# EAGLE board aleph-primary130828 (EAGLE 6.4), part 1 of 3
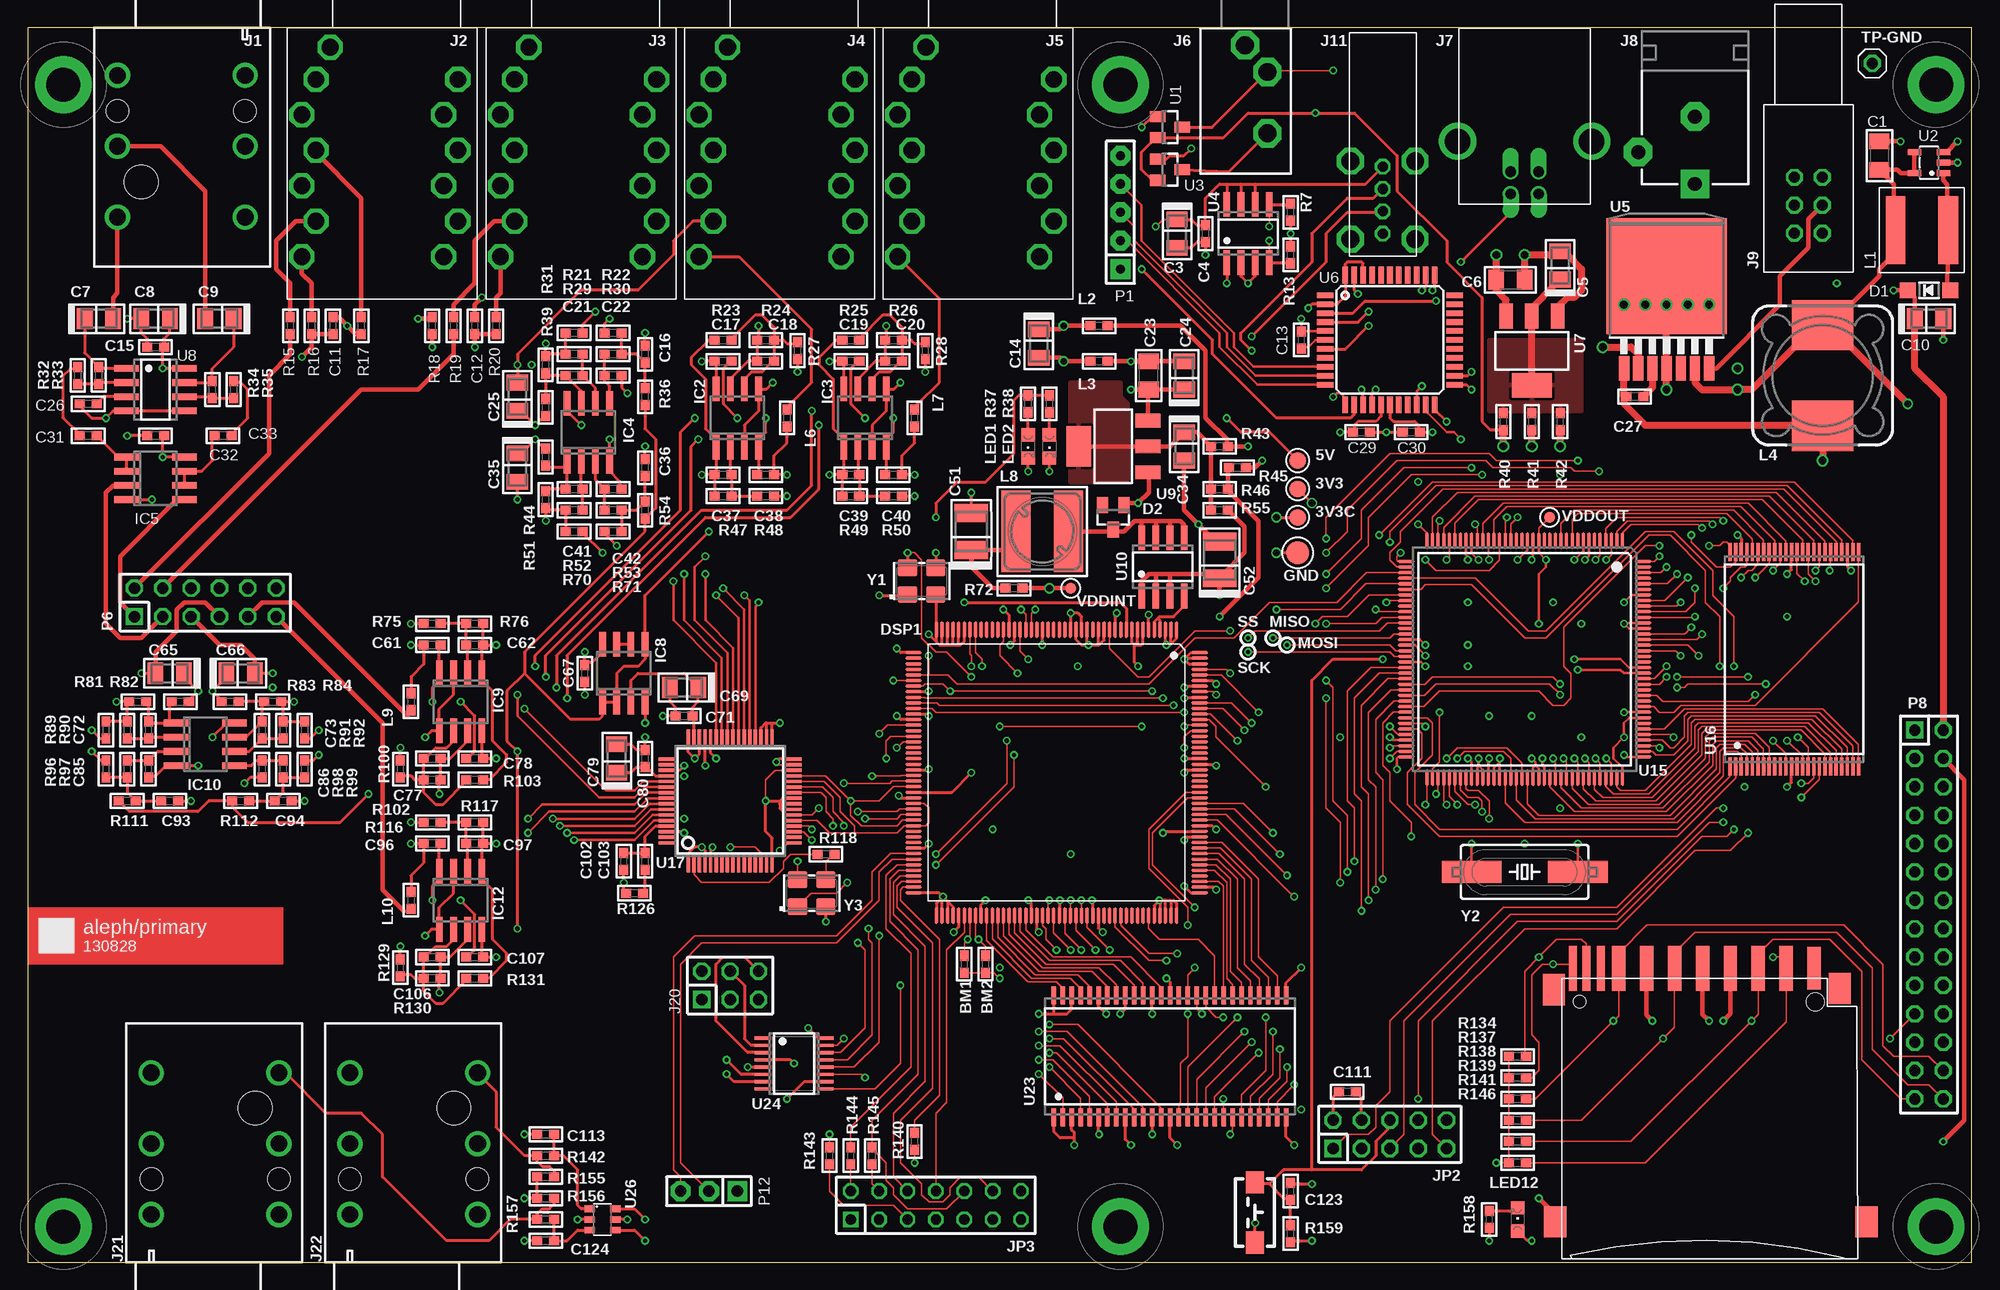
[diagram p0: board, top side]
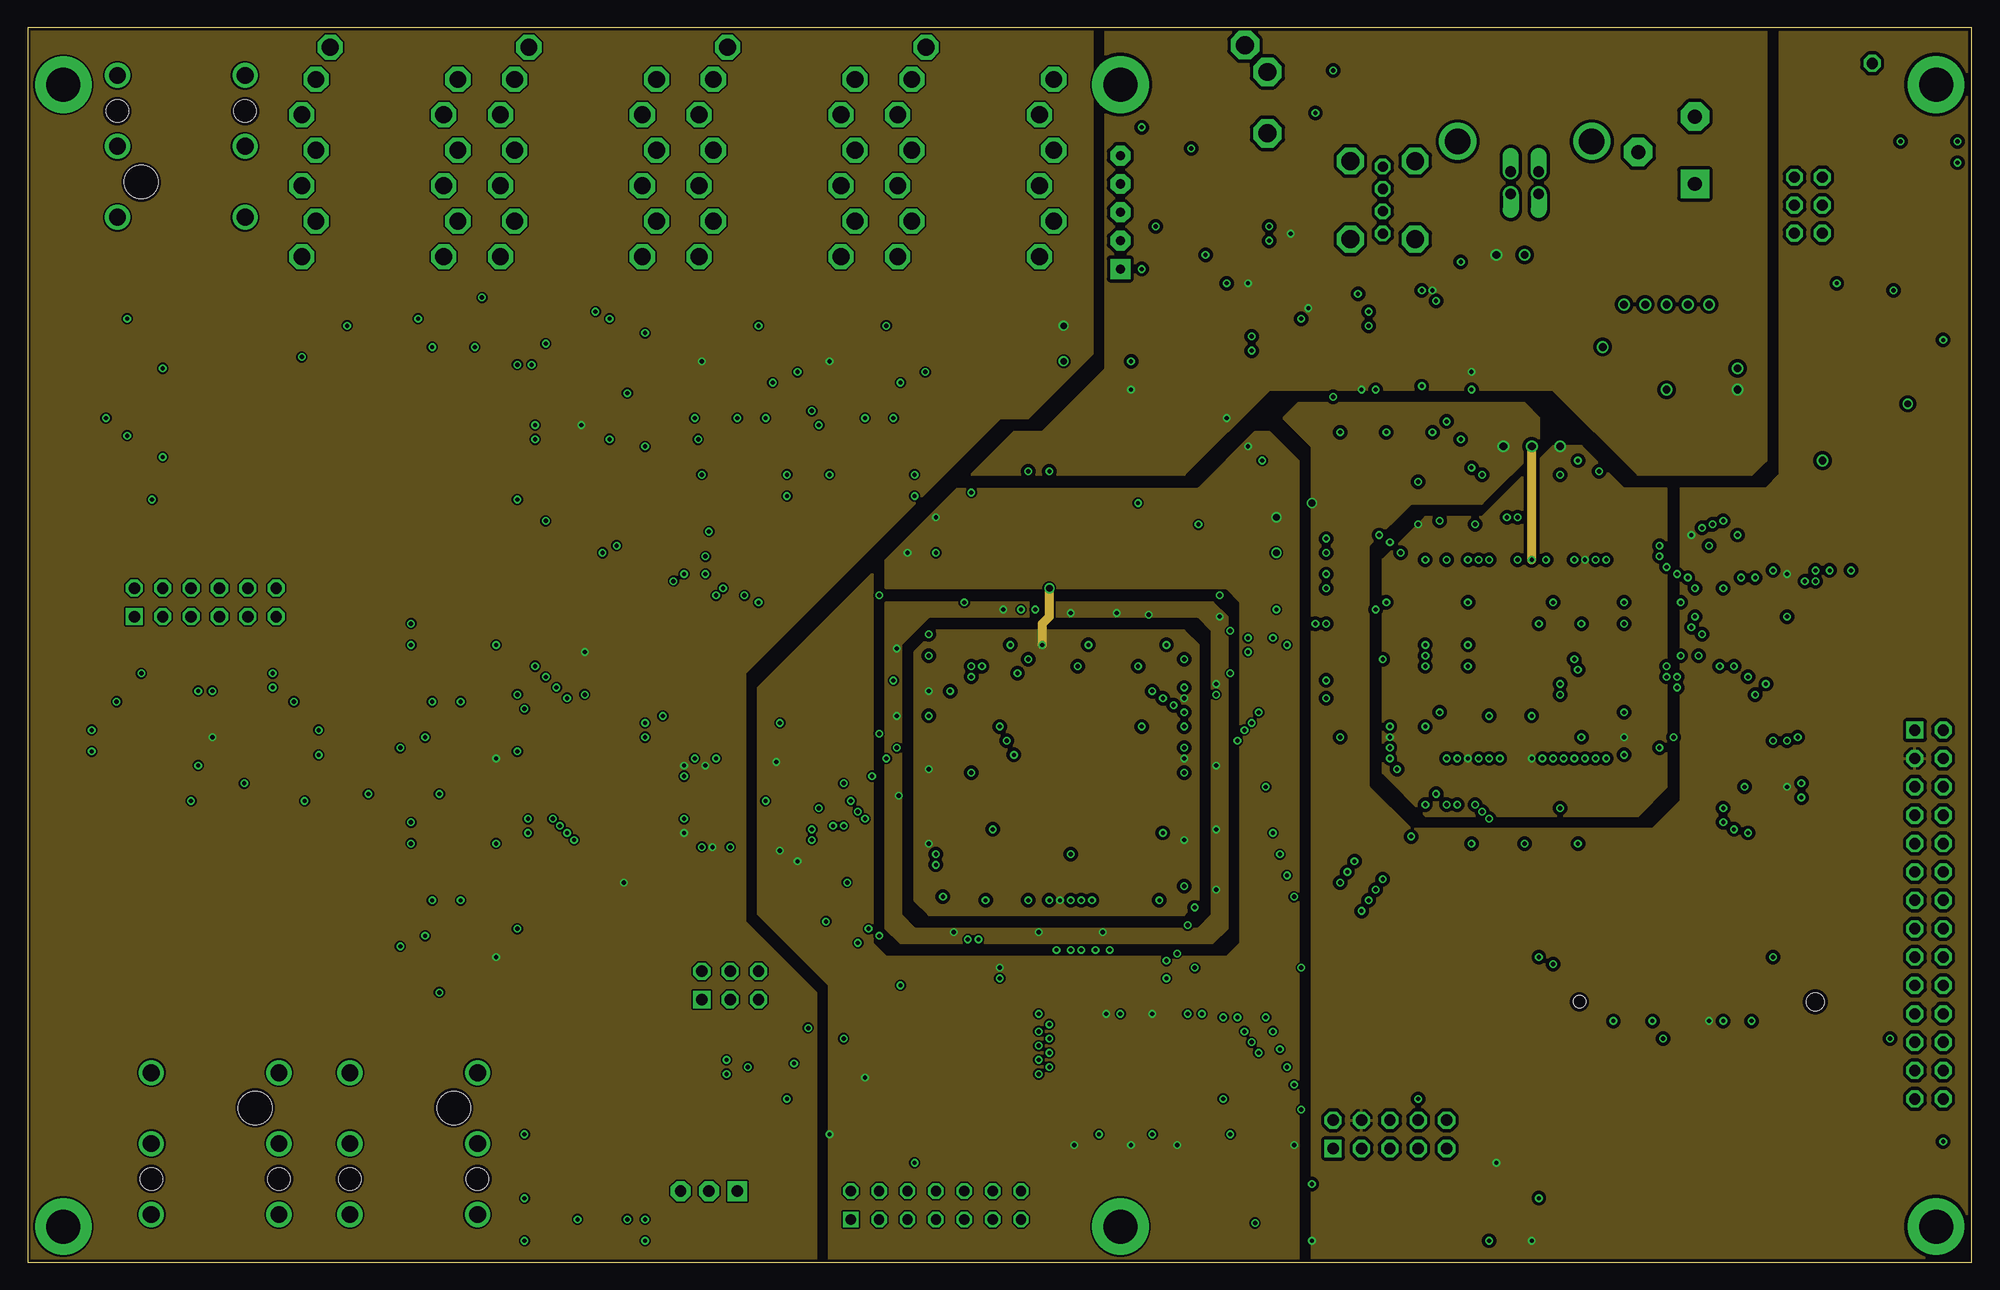
[diagram p1: board, inner layer power]
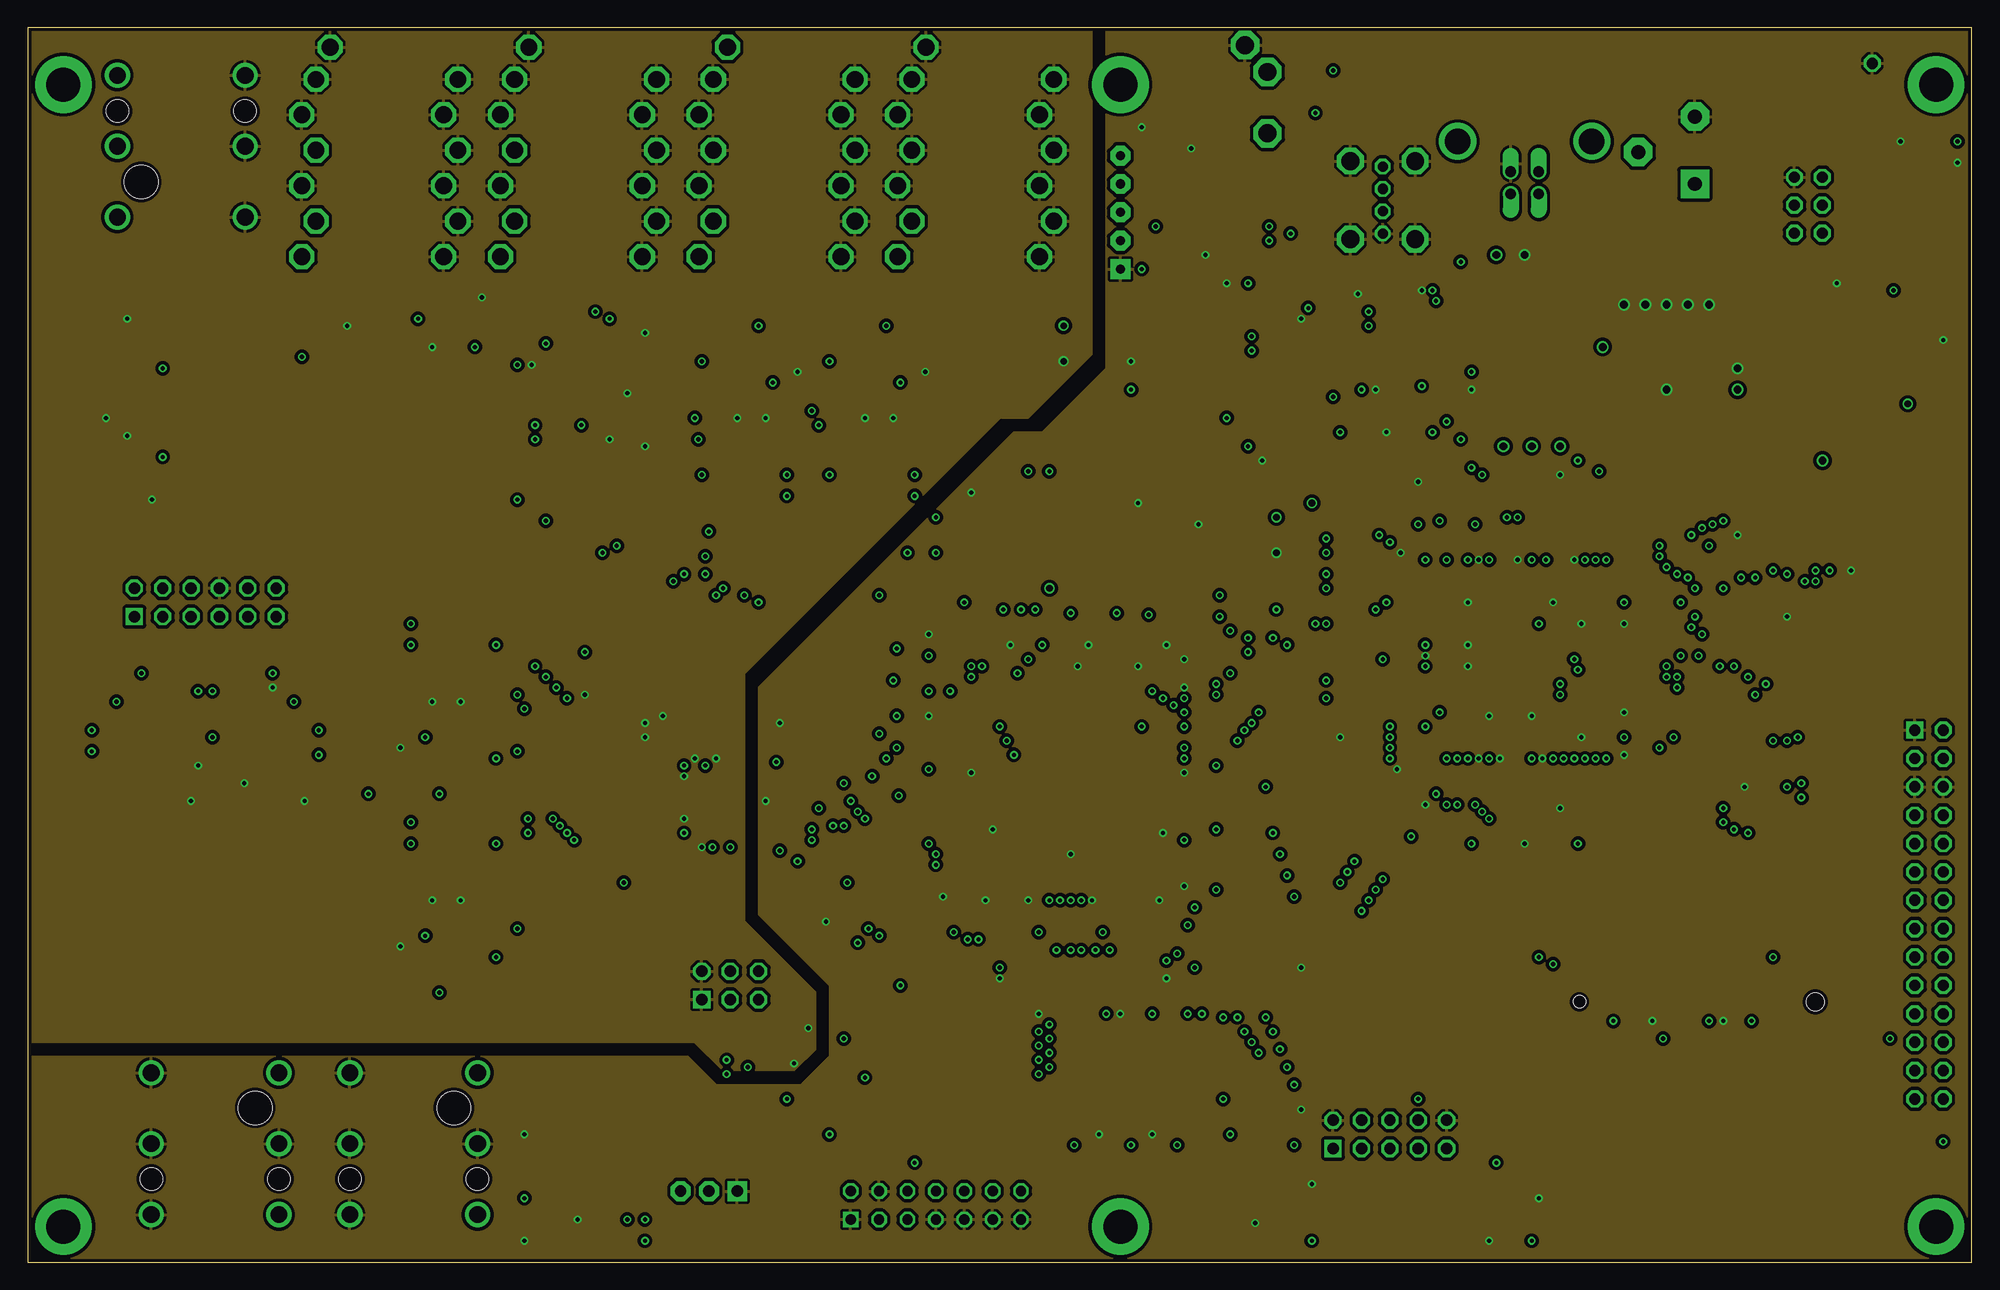
[diagram p2: board, inner layer gnd]
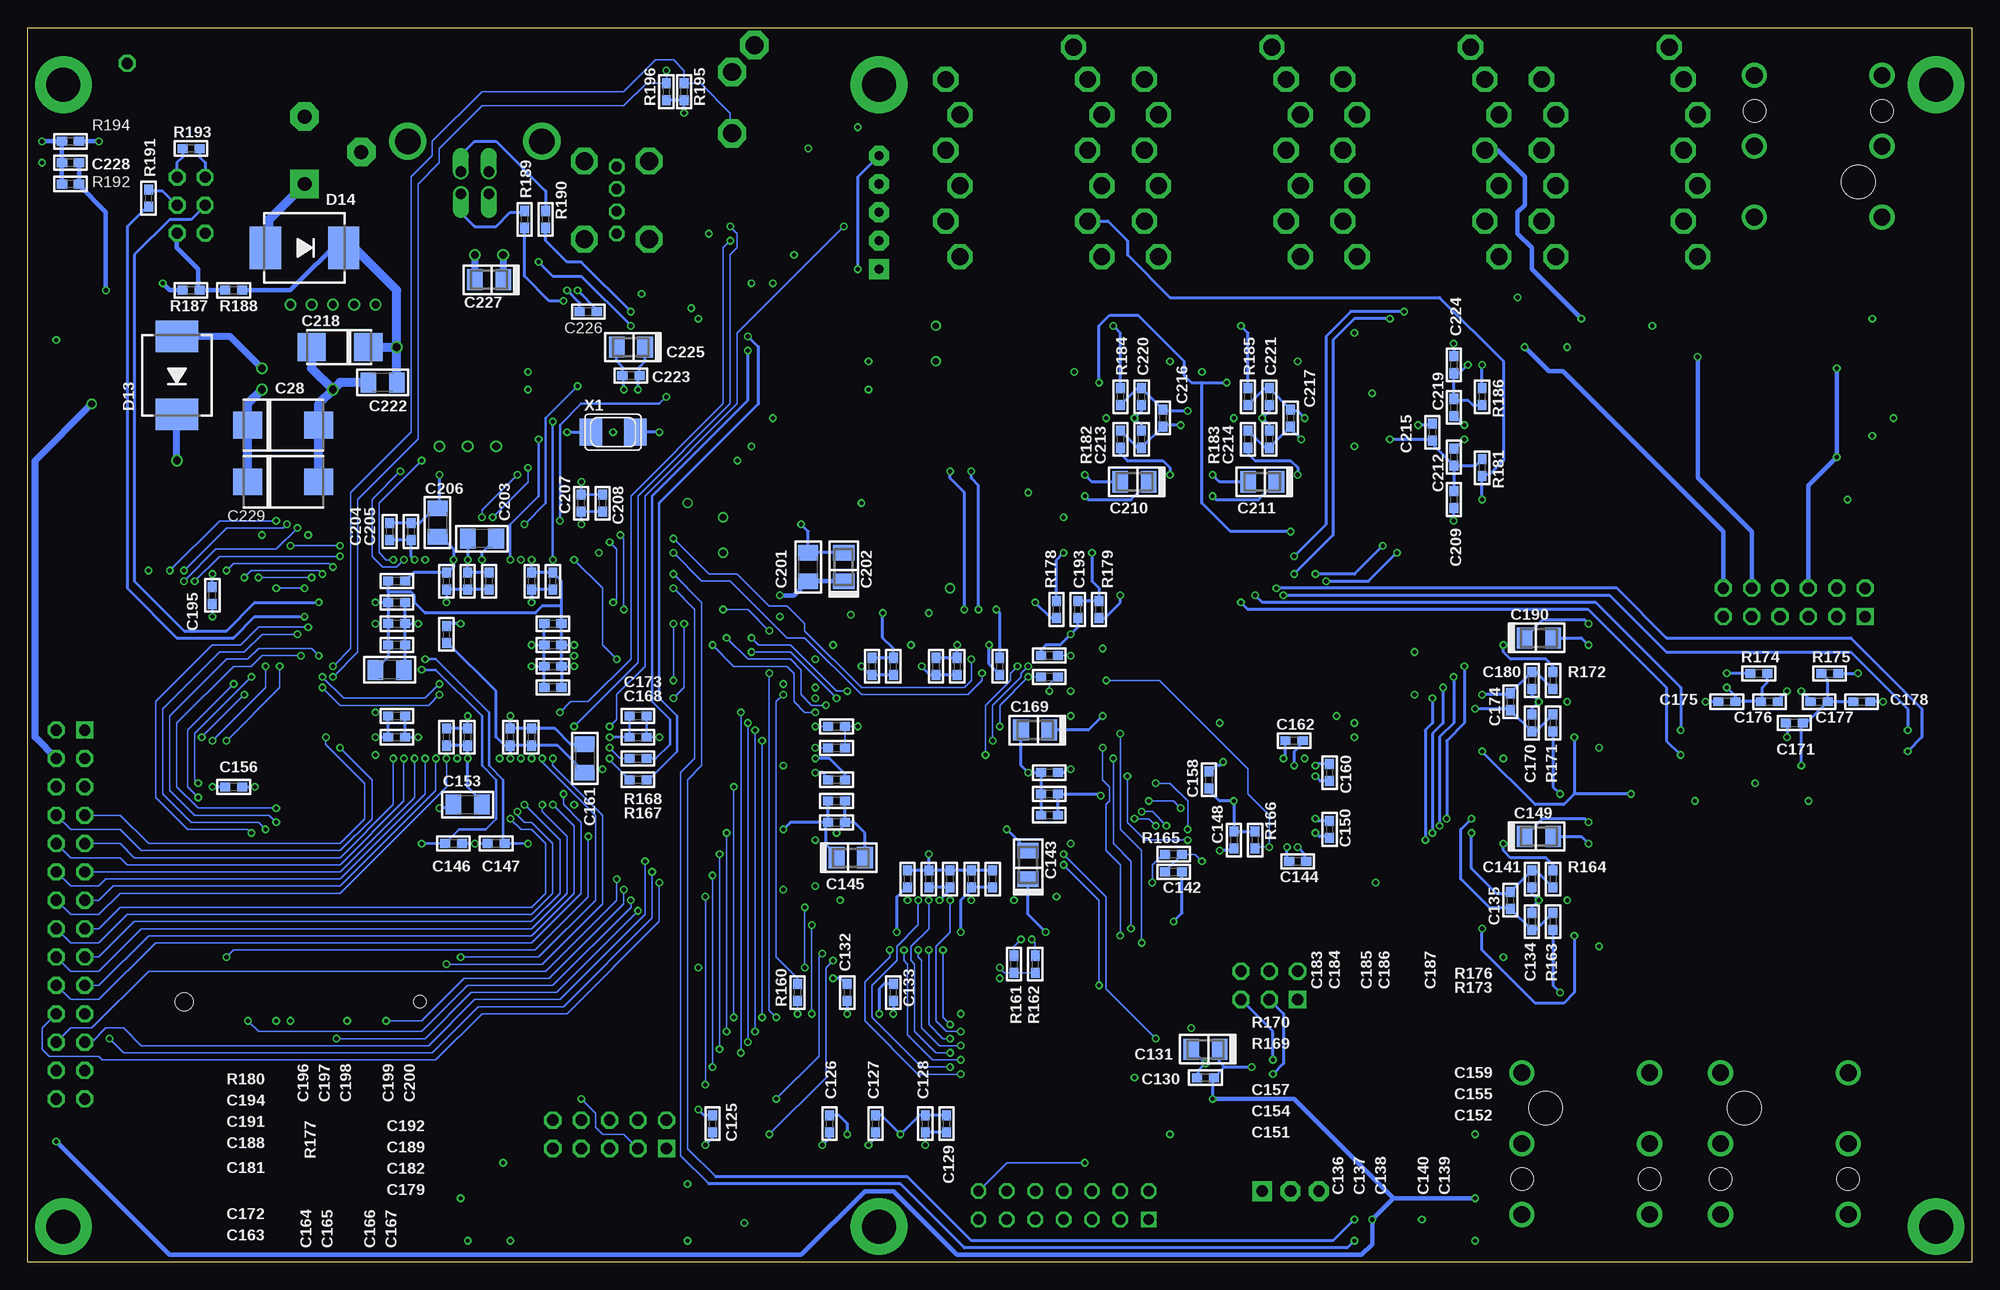
[diagram p3: board, bottom side, seen from below]

Size 173.99 x 110.49 mm. Coordinates in mm from the lower left corner, seen from the top.
Outline: 0,0 173.99,0 173.99,110.49 0,110.49 0,0
Copper layers (1*2+3*16): Top 0.035mm / dielectric 1.5mm / power 0.035mm / dielectric 0.15mm / gnd 0.035mm / dielectric 0.2mm / Bottom 0.035mm
Design rules "default *": minimum track width 6mil, minimum drill 15mil, track to track 6mil, track to pad 6mil, pad to pad 6mil, via to via 6mil, smd to smd 6mil, copper to edge 10mil, drill to drill 8mil, minimum pad ring 6mil, minimum via ring 6mil, stop-mask expansion 4mil, vias tented up to drill 0mil, thermal gap 10mil

## Footprints (pad centres in the part's own frame; a part is rotated, then mirrored left to right if it is on the bottom)
SMD-15R = smd 1.5 x 1.5: TP 0,0
R0603 = smd 0.9 x 0.8: 1 -0.762,0; 2 0.762,0
C1206 = smd 1.4 x 1.8: 1 -1.27,0; 2 1.27,0
C1206/T = smd 1.4 x 1.9: + 1.27,0; - -1.27,0
C0603 = smd 0.9 x 0.8: 1 -0.762,0; 2 0.762,0
C7343-43 = smd 2.6 x 2.4: + 3.175,0; - -3.175,0
C1210/T = smd 1.6 x 3: + 1.651,0; - -1.651,0
C6032-28/T = smd 2.55 x 2.5: + 2.54,0; - -2.54,0
SOD123 = smd 1.4 x 1.4: A 1.905,0; C -1.905,0
SOT23 = smd 1 x 1.4: 1 -0.95,-1.1; 2 0.95,-1.1; 3 0,1.1
SMC = smd 2.8 x 3.8: A 3.493,0; C -3.493,0
LQFP176 = smd 1.5 x 0.25: P$1 -12.8,10.75; P$2 -12.8,10.25; P$3 -12.8,9.75; P$4 -12.8,9.25; P$5 -12.8,8.75; P$6 -12.8,8.25; P$7 -12.8,7.75; P$8 -12.8,7.25; P$9 -12.8,6.75; P$10 -12.8,6.25; P$11 -12.8,5.75; P$12 -12.8,5.25; P$13 -12.8,4.75; P$14 -12.8,4.25; P$15 -12.8,3.75; P$16 -12.8,3.25; P$17 -12.8,2.75; P$18 -12.8,2.25; P$19 -12.8,1.75; P$20 -12.8,1.25; P$21 -12.8,0.75; P$22 -12.8,0.25; P$23 -12.8,-0.25; P$24 -12.8,-0.75; P$25 -12.8,-1.25; P$26 -12.8,-1.75; P$27 -12.8,-2.25; P$28 -12.8,-2.75; P$29 -12.8,-3.25; P$30 -12.8,-3.75; P$31 -12.8,-4.25; P$32 -12.8,-4.75; P$33 -12.8,-5.25; P$34 -12.8,-5.75; P$35 -12.8,-6.25; P$36 -12.8,-6.75; P$37 -12.8,-7.25; P$38 -12.8,-7.75; P$39 -12.8,-8.25; P$40 -12.8,-8.75; P$41 -12.8,-9.25; P$42 -12.8,-9.75; P$43 -12.8,-10.25; P$44 -12.8,-10.75; P$89 12.8,-10.75; P$90 12.8,-10.25; P$91 12.8,-9.75; P$92 12.8,-9.25; P$93 12.8,-8.75; P$94 12.8,-8.25; P$95 12.8,-7.75; P$96 12.8,-7.25; P$97 12.8,-6.75; P$98 12.8,-6.25; P$99 12.8,-5.75; P$100 12.8,-5.25; P$101 12.8,-4.75; P$102 12.8,-4.25; P$103 12.8,-3.75; P$104 12.8,-3.25; P$105 12.8,-2.75; P$106 12.8,-2.25; P$107 12.8,-1.75; P$108 12.8,-1.25; P$109 12.8,-0.75; P$110 12.8,-0.25; P$111 12.8,0.25; P$112 12.8,0.75; P$113 12.8,1.25; P$114 12.8,1.75; P$115 12.8,2.25; P$116 12.8,2.75; P$117 12.8,3.25; P$118 12.8,3.75; P$119 12.8,4.25; P$120 12.8,4.75; P$121 12.8,5.25; P$122 12.8,5.75; P$123 12.8,6.25; P$124 12.8,6.75; P$125 12.8,7.25; P$126 12.8,7.75; P$127 12.8,8.25; P$128 12.8,8.75; P$129 12.8,9.25; P$130 12.8,9.75; P$131 12.8,10.25; P$132 12.8,10.75 | smd 0.25 x 1.5: P$45 -10.75,-12.8; P$46 -10.25,-12.8; P$47 -9.75,-12.8; P$48 -9.25,-12.8; P$49 -8.75,-12.8; P$50 -8.25,-12.8; P$51 -7.75,-12.8; P$52 -7.25,-12.8; P$53 -6.75,-12.8; P$54 -6.25,-12.8; P$55 -5.75,-12.8; P$56 -5.25,-12.8; P$57 -4.75,-12.8; P$58 -4.25,-12.8; P$59 -3.75,-12.8; P$60 -3.25,-12.8; P$61 -2.75,-12.8; P$62 -2.25,-12.8; P$63 -1.75,-12.8; P$64 -1.25,-12.8; P$65 -0.75,-12.8; P$66 -0.25,-12.8; P$67 0.25,-12.8; P$68 0.75,-12.8; P$69 1.25,-12.8; P$70 1.75,-12.8; P$71 2.25,-12.8; P$72 2.75,-12.8; P$73 3.25,-12.8; P$74 3.75,-12.8; P$75 4.25,-12.8; P$76 4.75,-12.8; P$77 5.25,-12.8; P$78 5.75,-12.8; P$79 6.25,-12.8; P$80 6.75,-12.8; P$81 7.25,-12.8; P$82 7.75,-12.8; P$83 8.25,-12.8; P$84 8.75,-12.8; P$85 9.25,-12.8; P$86 9.75,-12.8; P$87 10.25,-12.8; P$88 10.75,-12.8; P$133 10.75,12.8; P$134 10.25,12.8; P$135 9.75,12.8; P$136 9.25,12.8; P$137 8.75,12.8; P$138 8.25,12.8; P$139 7.75,12.8; P$140 7.25,12.8; P$141 6.75,12.8; P$142 6.25,12.8; P$143 5.75,12.8; P$144 5.25,12.8; P$145 4.75,12.8; P$146 4.25,12.8; P$147 3.75,12.8; P$148 3.25,12.8; P$149 2.75,12.8; P$150 2.25,12.8; P$151 1.75,12.8; P$152 1.25,12.8; P$153 0.75,12.8; P$154 0.25,12.8; P$155 -0.25,12.8; P$156 -0.75,12.8; P$157 -1.25,12.8; P$158 -1.75,12.8; P$159 -2.25,12.8; P$160 -2.75,12.8; P$161 -3.25,12.8; P$162 -3.75,12.8; P$163 -4.25,12.8; P$164 -4.75,12.8; P$165 -5.25,12.8; P$166 -5.75,12.8; P$167 -6.25,12.8; P$168 -6.75,12.8; P$169 -7.25,12.8; P$170 -7.75,12.8; P$171 -8.25,12.8; P$172 -8.75,12.8; P$173 -9.25,12.8; P$174 -9.75,12.8; P$175 -10.25,12.8; P$176 -10.75,12.8
SMD-20R = smd 2 x 2: TP 0,0
120-PAD-NS = drill 3.048 pad 5.08: B120 0,0
SO8 = smd 0.6 x 2.2: 1 -1.905,-2.6; 2 -0.635,-2.6; 3 0.635,-2.6; 4 1.905,-2.6; 5 1.905,2.6; 6 0.635,2.6; 7 -0.635,2.6; 8 -1.905,2.6
NEUTRIK-NRJ6HF-1 = drill 1.5: R 7.23,10.6; RN -4.2,10.6; S 7.23,4.25; SN -4.2,4.25; T 7.23,16.95; TN -4.2,16.95 | hole 3: 5.1,13.8 | hole 2: 7.23,7.45; -4.2,7.45
NSJ12HF = drill 1.5 octagon: G -1.73,5.96; RB -10.95,7.23; RNB -10.95,-5.47; RNT -14.13,-4.2; RT -14.13,8.5; SB -4.606,7.23; SNB -4.606,-5.47; SNT -7.78,-4.2; ST -7.78,8.5; TB -17.3,7.23; TNB -17.3,-5.47; TNT -20.48,-4.2; TT -20.48,8.5
SJ1-3533NG = drill 1.6 pad 2.54 octagon: 1 -1,-0.9; 2 1.4,1.1; 3 6.9,1.1
USB_B = drill 0.95 offset: DM -1.25,4.71; DP -1.25,2.71; GND 1.25,2.71; VCC 1.25,4.71 | drill 2.3: MOUNT1 -6,0; MOUNT2 6,0
PJ-102XH = drill 1.245 pad 2.54 square: 1 0,0 | drill 1.245 pad 2.54 octagon: 2 0,-6.032; 3 5.08,-2.857
PHA2U = drill 1 octagon: 0 -1.25,0; 1 -1.25,-2.5; 2 -1.25,2.5; _0 1.25,0; _1 1.25,-2.5; _2 1.25,2.5
USBA-VERT = drill 0.92 octagon: 1 0,-6; 2 0,-4; 3 0,-2; 4 0,0 | drill 1.6 octagon: G1 -2.9,0.5; G2 -2.9,-6.5; G3 2.9,-6.5; G4 2.9,0.5
DIL-100-2X03 = drill 1.016 square: 1 -2.54,-1.27 | drill 1.016 octagon: 2 -2.54,1.27; 3 0,-1.27; 4 0,1.27; 5 2.54,-1.27; 6 2.54,1.27
AVR-JTAG-10 = drill 1.016 square: 1 -5.08,-1.27 | drill 1.016 octagon: 2 -5.08,1.27; 3 -2.54,-1.27; 4 -2.54,1.27; 5 0,-1.27; 6 0,1.27; 7 2.54,-1.27; 8 2.54,1.27; 9 5.08,-1.27; 10 5.08,1.27
JPQ-07 = drill 0.914 square: 1 -7.62,-1.27 | drill 0.914 octagon: 2 -7.62,1.27; 3 -5.08,-1.27; 4 -5.08,1.27; 5 -2.54,-1.27; 6 -2.54,1.27; 7 0,-1.27; 8 0,1.27; 9 2.54,-1.27; 10 2.54,1.27; 11 5.08,-1.27; 12 5.08,1.27; 13 7.62,-1.27; 14 7.62,1.27
XAL7030-103 = smd 1.778 x 6.096: P$1 -2.362,0; P$2 2.362,0
L0603 = smd 0.9 x 0.8: 1 -0.762,0; 2 0.762,0
MSS1278 = smd 5.5 x 4.5: 1 0,4.5; 2 0,-4.5
SRR6038 = smd 7.3 x 2.6: 1 0,2.35; 2 0,-2.35
CHIPLED_0805 = smd 1.2 x 1.2: A 0,-1.05; C 0,1.05
SIP-100-05-32 = drill 0.813 pad 1.778 square: 1 -5.08,0 | drill 0.813 pad 1.778 octagon: 2 -2.54,0; 3 0,0; 4 2.54,0; 5 5.08,0
DIL-100-2X06 = drill 1.016 square: 1 -6.35,-1.27 | drill 1.016 octagon: 2 -6.35,1.27; 3 -3.81,-1.27; 4 -3.81,1.27; 5 -1.27,-1.27; 6 -1.27,1.27; 7 1.27,-1.27; 8 1.27,1.27; 9 3.81,-1.27; 10 3.81,1.27; 11 6.35,-1.27; 12 6.35,1.27
DIL-100-2X14 = drill 1.016 square: 1 -16.51,-1.27 | drill 1.016 octagon: 2 -16.51,1.27; 3 -13.97,-1.27; 4 -13.97,1.27; 5 -11.43,-1.27; 6 -11.43,1.27; 7 -8.89,-1.27; 8 -8.89,1.27; 9 -6.35,-1.27; 10 -6.35,1.27; 11 -3.81,-1.27; 12 -3.81,1.27; 13 -1.27,-1.27; 14 -1.27,1.27; 15 1.27,-1.27; 16 1.27,1.27; 17 3.81,-1.27; 18 3.81,1.27; 19 6.35,-1.27; 20 6.35,1.27; 21 8.89,-1.27; 22 8.89,1.27; 23 11.43,-1.27; 24 11.43,1.27; 25 13.97,-1.27; 26 13.97,1.27; 27 16.51,-1.27; 28 16.51,1.27
SIP-100-03-40 = drill 1.016 pad 1.778 square: 1 -2.54,0 | drill 1.016 pad 1.778 octagon: 2 0,0; 3 2.54,0
06132 = smd 1.2 x 4: 1 6.9,0.9; 2 4.4,0.9; 3 1.9,0.9; 4 -0.6,0.9; 5 -3.1,0.9; 6 -5.6,0.9; 7 -8.1,0.9 | smd 0.7 x 4: 8 -9.7,0.9; CD -11,0.9; WP -12.2,0.9 | smd 1.2 x 3.81: 9 9.4,0.9 | smd 2 x 2.8: GP -13.8,-21.8; GP2 14.1,-21.8; GP3 11.7,-0.9; GP4 -13.9,-1 | hole 1.1: -11.6,-2.1 | hole 1.6: 9.5,-2.1
PANASONIC-EVQ = smd 2 x 1.6: 1 2.7,0; 2 -2.7,0
1X01 = drill 1.016 octagon: 1 0,0
SOT23-5 = smd 0.55 x 1.2: 1 -0.95,-1.3; 2 0,-1.3; 3 0.95,-1.3; 4 0.95,1.3; 5 -0.95,1.3
SO08 = smd 0.6 x 2.2: 1 -1.905,-2.6; 2 -0.635,-2.6; 3 0.635,-2.6; 4 1.905,-2.6; 5 1.905,2.6; 6 0.635,2.6; 7 -0.635,2.6; 8 -1.905,2.6
TO263-7 = smd 0.914 x 2.159: 1 -3.81,-5.715; 2 -2.54,-5.715; 3 -1.27,-5.715; 4 0,-5.715; 5 1.27,-5.715; 6 2.54,-5.715; 7 3.81,-5.715 | smd 10.8 x 10.41: 8 0,2.54
TQFP44 = smd 1.5 x 0.5: 1 -5.8,4; 2 -5.8,3.2; 3 -5.8,2.4; 4 -5.8,1.6; 5 -5.8,0.8; 6 -5.8,0; 7 -5.8,-0.8; 8 -5.8,-1.6; 9 -5.8,-2.4; 10 -5.8,-3.2; 11 -5.8,-4; 23 5.8,-4; 24 5.8,-3.2; 25 5.8,-2.4; 26 5.8,-1.6; 27 5.8,-0.8; 28 5.8,0; 29 5.8,0.8; 30 5.8,1.6; 31 5.8,2.4; 32 5.8,3.2; 33 5.8,4 | smd 0.5 x 1.5: 12 -4,-5.8; 13 -3.2,-5.8; 14 -2.4,-5.8; 15 -1.6,-5.8; 16 -0.8,-5.8; 17 0,-5.8; 18 0.8,-5.8; 19 1.6,-5.8; 20 2.4,-5.8; 21 3.2,-5.8; 22 4,-5.8; 34 4,5.8; 35 3.2,5.8; 36 2.4,5.8; 37 1.6,5.8; 38 0.8,5.8; 39 0,5.8; 40 -0.8,5.8; 41 -1.6,5.8; 42 -2.4,5.8; 43 -3.2,5.8; 44 -4,5.8
SOT223 = smd 1.219 x 2.235: 1 -2.311,-3.099; 2 0,-3.099; 3 2.311,-3.099 | smd 3.6 x 2.2: 4 0,3.099
LQFP144 = smd 0.25 x 1.5: 1 -8.75,-10.6; 2 -8.25,-10.6; 3 -7.75,-10.6; 4 -7.25,-10.6; 5 -6.75,-10.6; 6 -6.25,-10.6; 7 -5.75,-10.6; 8 -5.25,-10.6; 9 -4.75,-10.6; 10 -4.25,-10.6; 11 -3.75,-10.6; 12 -3.25,-10.6; 13 -2.75,-10.6; 14 -2.25,-10.6; 15 -1.75,-10.6; 16 -1.25,-10.6; 17 -0.75,-10.6; 18 -0.25,-10.6; 19 0.25,-10.6; 20 0.75,-10.6; 21 1.25,-10.6; 22 1.75,-10.6; 23 2.25,-10.6; 24 2.75,-10.6; 25 3.25,-10.6; 26 3.75,-10.6; 27 4.25,-10.6; 28 4.75,-10.6; 29 5.25,-10.6; 30 5.75,-10.6; 31 6.25,-10.6; 32 6.75,-10.6; 33 7.25,-10.6; 34 7.75,-10.6; 35 8.25,-10.6; 36 8.75,-10.6; 73 8.75,10.6; 74 8.25,10.6; 75 7.75,10.6; 76 7.25,10.6; 77 6.75,10.6; 78 6.25,10.6; 79 5.75,10.6; 80 5.25,10.6; 81 4.75,10.6; 82 4.25,10.6; 83 3.75,10.6; 84 3.25,10.6; 85 2.75,10.6; 86 2.25,10.6; 87 1.75,10.6; 88 1.25,10.6; 89 0.75,10.6; 90 0.25,10.6; 91 -0.25,10.6; 92 -0.75,10.6; 93 -1.25,10.6; 94 -1.75,10.6; 95 -2.25,10.6; 96 -2.75,10.6; 97 -3.25,10.6; 98 -3.75,10.6; 99 -4.25,10.6; 100 -4.75,10.6; 101 -5.25,10.6; 102 -5.75,10.6; 103 -6.25,10.6; 104 -6.75,10.6; 105 -7.25,10.6; 106 -7.75,10.6; 107 -8.25,10.6; 108 -8.75,10.6 | smd 1.5 x 0.25: 37 10.6,-8.75; 38 10.6,-8.25; 39 10.6,-7.75; 40 10.6,-7.25; 41 10.6,-6.75; 42 10.6,-6.25; 43 10.6,-5.75; 44 10.6,-5.25; 45 10.6,-4.75; 46 10.6,-4.25; 47 10.6,-3.75; 48 10.6,-3.25; 49 10.6,-2.75; 50 10.6,-2.25; 51 10.6,-1.75; 52 10.6,-1.25; 53 10.6,-0.75; 54 10.6,-0.25; 55 10.6,0.25; 56 10.6,0.75; 57 10.6,1.25; 58 10.6,1.75; 59 10.6,2.25; 60 10.6,2.75; 61 10.6,3.25; 62 10.6,3.75; 63 10.6,4.25; 64 10.6,4.75; 65 10.6,5.25; 66 10.6,5.75; 67 10.6,6.25; 68 10.6,6.75; 69 10.6,7.25; 70 10.6,7.75; 71 10.6,8.25; 72 10.6,8.75; 109 -10.6,8.75; 110 -10.6,8.25; 111 -10.6,7.75; 112 -10.6,7.25; 113 -10.6,6.75; 114 -10.6,6.25; 115 -10.6,5.75; 116 -10.6,5.25; 117 -10.6,4.75; 118 -10.6,4.25; 119 -10.6,3.75; 120 -10.6,3.25; 121 -10.6,2.75; 122 -10.6,2.25; 123 -10.6,1.75; 124 -10.6,1.25; 125 -10.6,0.75; 126 -10.6,0.25; 127 -10.6,-0.25; 128 -10.6,-0.75; 129 -10.6,-1.25; 130 -10.6,-1.75; 131 -10.6,-2.25; 132 -10.6,-2.75; 133 -10.6,-3.25; 134 -10.6,-3.75; 135 -10.6,-4.25; 136 -10.6,-4.75; 137 -10.6,-5.25; 138 -10.6,-5.75; 139 -10.6,-6.25; 140 -10.6,-6.75; 141 -10.6,-7.25; 142 -10.6,-7.75; 143 -10.6,-8.25; 144 -10.6,-8.75
TSOP48 = smd 0.3 x 1.6: 1 -5.75,-9.6; 2 -5.25,-9.6; 3 -4.75,-9.6; 4 -4.25,-9.6; 5 -3.75,-9.6; 6 -3.25,-9.6; 7 -2.75,-9.6; 8 -2.25,-9.6; 9 -1.75,-9.6; 10 -1.25,-9.6; 11 -0.75,-9.6; 12 -0.25,-9.6; 13 0.25,-9.6; 14 0.75,-9.6; 15 1.25,-9.6; 16 1.75,-9.6; 17 2.25,-9.6; 18 2.75,-9.6; 19 3.25,-9.6; 20 3.75,-9.6; 21 4.25,-9.6; 22 4.75,-9.6; 23 5.25,-9.6; 24 5.75,-9.6; 25 5.75,9.6; 26 5.25,9.6; 27 4.75,9.6; 28 4.25,9.6; 29 3.75,9.6; 30 3.25,9.6; 31 2.75,9.6; 32 2.25,9.6; 33 1.75,9.6; 34 1.25,9.6; 35 0.75,9.6; 36 0.25,9.6; 37 -0.25,9.6; 38 -0.75,9.6; 39 -1.25,9.6; 40 -1.75,9.6; 41 -2.25,9.6; 42 -2.75,9.6; 43 -3.25,9.6; 44 -3.75,9.6; 45 -4.25,9.6; 46 -4.75,9.6; 47 -5.25,9.6; 48 -5.75,9.6
SQFP-S-10X10-64 = smd 0.3 x 1.6: 1 -3.75,-5.6; 2 -3.25,-5.6; 3 -2.75,-5.6; 4 -2.25,-5.6; 5 -1.75,-5.6; 6 -1.25,-5.6; 7 -0.75,-5.6; 8 -0.25,-5.6; 9 0.25,-5.6; 10 0.75,-5.6; 11 1.25,-5.6; 12 1.75,-5.6; 13 2.25,-5.6; 14 2.75,-5.6; 15 3.25,-5.6; 16 3.75,-5.6; 33 3.75,5.6; 34 3.25,5.6; 35 2.75,5.6; 36 2.25,5.6; 37 1.75,5.6; 38 1.25,5.6; 39 0.75,5.6; 40 0.25,5.6; 41 -0.25,5.6; 42 -0.75,5.6; 43 -1.25,5.6; 44 -1.75,5.6; 45 -2.25,5.6; 46 -2.75,5.6; 47 -3.25,5.6; 48 -3.75,5.6 | smd 1.6 x 0.3: 17 5.6,-3.75; 18 5.6,-3.25; 19 5.6,-2.75; 20 5.6,-2.25; 21 5.6,-1.75; 22 5.6,-1.25; 23 5.6,-0.75; 24 5.6,-0.25; 25 5.6,0.25; 26 5.6,0.75; 27 5.6,1.25; 28 5.6,1.75; 29 5.6,2.25; 30 5.6,2.75; 31 5.6,3.25; 32 5.6,3.75; 49 -5.6,3.75; 50 -5.6,3.25; 51 -5.6,2.75; 52 -5.6,2.25; 53 -5.6,1.75; 54 -5.6,1.25; 55 -5.6,0.75; 56 -5.6,0.25; 57 -5.6,-0.25; 58 -5.6,-0.75; 59 -5.6,-1.25; 60 -5.6,-1.75; 61 -5.6,-2.25; 62 -5.6,-2.75; 63 -5.6,-3.25; 64 -5.6,-3.75
TSOP54 = smd 0.4 x 1.6: 1 -10.4,-5.45; 2 -9.6,-5.45; 3 -8.8,-5.45; 4 -8,-5.45; 5 -7.2,-5.45; 6 -6.4,-5.45; 7 -5.6,-5.45; 8 -4.8,-5.45; 9 -4,-5.45; 10 -3.2,-5.45; 11 -2.4,-5.45; 12 -1.6,-5.45; 13 -0.8,-5.45; 14 0,-5.45; 15 0.8,-5.45; 16 1.6,-5.45; 17 2.4,-5.45; 18 3.2,-5.45; 19 4,-5.45; 20 4.8,-5.45; 21 5.6,-5.45; 22 6.4,-5.45; 23 7.2,-5.45; 24 8,-5.45; 25 8.8,-5.45; 26 9.6,-5.45; 27 10.4,-5.45; 28 10.4,5.45; 29 9.6,5.45; 30 8.8,5.45; 31 8,5.45; 32 7.2,5.45; 33 6.4,5.45; 34 5.6,5.45; 35 4.8,5.45; 36 4,5.45; 37 3.2,5.45; 38 2.4,5.45; 39 1.6,5.45; 40 0.8,5.45; 41 0,5.45; 42 -0.8,5.45; 43 -1.6,5.45; 44 -2.4,5.45; 45 -3.2,5.45; 46 -4,5.45; 47 -4.8,5.45; 48 -5.6,5.45; 49 -6.4,5.45; 50 -7.2,5.45; 51 -8,5.45; 52 -8.8,5.45; 53 -9.6,5.45; 54 -10.4,5.45
TSSOP16 = smd 0.3 x 1.5: 1 -2.275,-2.8; 2 -1.625,-2.8; 3 -0.975,-2.8; 4 -0.325,-2.8; 5 0.325,-2.8; 6 0.975,-2.8; 7 1.625,-2.8; 8 2.275,-2.8; 9 2.275,2.8; 10 1.625,2.8; 11 0.975,2.8; 12 0.325,2.8; 13 -0.325,2.8; 14 -0.975,2.8; 15 -1.625,2.8; 16 -2.275,2.8
SOT23-6 = smd 0.6 x 0.9: 1 -0.95,-1.15; 2 0,-1.15; 3 0.95,-1.15; 4 0.95,1.15; 5 0,1.15; 6 -0.95,1.15
SMD-10R = smd 1 x 1: TP 0,0
NX5032 = smd 2 x 2.4: P$1 2,0; P$2 -2,0
ASFL1 = smd 1.7 x 1.5: 1 -1.27,-1.2; 2 1.27,-1.2; 3 1.27,1.2; 4 -1.27,1.2
HC49UP@1 = smd 5.334 x 1.93: 1 -4.763,0; 2 4.763,0

## Placement (x,y rotation side)
3V3  TPS-SMD-15R  [SMD-15R]  113.67,69.22 0 top
3V3C  TPS-SMD-15R  [SMD-15R]  113.67,66.67 0 top
5V  TPS-SMD-15R  [SMD-15R]  113.67,71.75 0 top
BM1  DNP  [R0603]  83.82,26.67 90 top
BM2  0  [R0603]  85.72,26.67 90 top
C1  2.2u  [C1206]  165.74,99.06 90 top
C3  4.7u  [C1206/T]  102.87,92.08 90 top
C4  100n  [C0603]  105.41,92.08 90 top
C5  10u  [C1206/T]  137.16,89.22 270 top
C6  100n  [C1206]  132.72,87.95 180 top
C7  68u  [C1206/T]  6.35,84.45 180 top
C8  10u  [C1206/T]  11.43,84.45 0 top
C9  68u  [C1206/T]  17.14,84.45 0 top
C10  4.7u  [C1206/T]  170.18,84.45 180 top
C11  100p  [C0603]  27.3,83.82 90 top
C12  100p  [C0603]  40.01,83.82 90 top
C13  1u  [C0603]  113.98,82.55 270 top
C14  10u  [C1206/T]  90.49,82.23 90 top
C15  100n  [C0603]  11.43,81.92 0 top
C16  680p  [C0603]  55.24,81.28 90 top
C17  100n  [C0603]  62.23,80.64 180 top
C18  120p  [C0603]  66.04,80.64 0 top
C19  100n  [C0603]  73.66,80.64 180 top
C20  120p  [C0603]  77.47,80.64 0 top
C21  100p  [C0603]  48.9,79.38 180 top
C22  220p  [C0603]  52.39,79.38 180 top
C23  100n  [C1206]  100.33,79.38 270 top
C24  10u  [C1206/T]  103.5,79.38 270 top
C25  10u  [C1206/T]  43.81,77.47 270 top
C26  100n  [C0603]  5.4,76.83 0 top
C27  10n  [C0603]  143.83,77.47 0 top
C28  100u  [C7343-43]  151.13,74.93 180 bottom
C29  8p  [C0603]  119.38,74.3 180 top
C30  8p  [C0603]  123.83,74.3 0 top
C31  1u  [C0603]  5.4,73.98 0 top
C32  100n  [C0603]  11.43,73.98 0 top
C33  1u  [C0603]  17.46,73.98 180 top
C34  10u  [C1206/T]  103.5,73.03 90 top
C35  10u  [C1206/T]  43.81,71.12 90 top
C36  680p  [C0603]  55.24,71.12 90 top
C37  120p  [C0603]  62.23,70.48 0 top
C38  100p  [C0603]  66.04,70.48 0 top
C39  120p  [C0603]  73.66,70.48 0 top
C40  100p  [C0603]  77.47,70.48 0 top
C41  100p  [C0603]  48.9,69.22 180 top
C42  220p  [C0603]  52.39,69.22 180 top
C51  100u  [C1210/T]  84.45,65.41 270 top
C52  100u  [C1210/T]  106.68,62.87 270 top
C61  100p  [C0603]  36.2,55.24 180 top
C62  120p  [C0603]  40.01,55.24 180 top
C65  10u  [C1206/T]  12.7,52.7 0 top
C66  10u  [C1206/T]  19.05,52.7 180 top
C67  100n  [C0603]  49.85,52.7 90 top
C69  10u  [C1206/T]  58.74,51.44 0 top
C71  100n  [C0603]  58.74,48.9 0 top
C72  100p  [C0603]  10.79,47.62 90 top
C73  100p  [C0603]  20.95,47.62 90 top
C77  120p  [C0603]  36.2,45.09 180 top
C78  100n  [C0603]  40.01,45.09 0 top
C79  47u  [C1206/T]  52.7,45.09 270 top
C80  100n  [C0603]  55.24,45.09 270 top
C85  220p  [C0603]  10.79,44.13 90 top
C86  220p  [C0603]  20.95,44.13 90 top
C93  680p  [C0603]  12.7,41.27 0 top
C94  680p  [C0603]  22.86,41.27 0 top
C96  100p  [C0603]  36.2,37.47 180 top
C97  120p  [C0603]  40.01,37.47 180 top
C102  390p  [C0603]  53.34,35.88 90 top
C103  5600p  [C0603]  55.24,35.88 90 top
C106  120p  [C0603]  36.2,27.3 180 top
C107  100n  [C0603]  40.01,27.3 0 top
C111  100n  [C0603]  118.11,15.24 180 top
C113  1u  [C0603]  46.35,11.43 0 top
C123  100n  [C0603]  113.03,6.35 90 top
C124  1u  [C0603]  46.35,1.91 0 top
C125  10n  [C0603]  112.71,12.38 270 bottom
C126  10n  [C0603]  102.23,12.38 270 bottom
C127  10n  [C0603]  98.11,12.38 270 bottom
C128  10n  [C0603]  93.66,12.38 270 bottom
C129  10n  [C0603]  91.76,12.38 270 bottom
C130  100n  [C0603]  68.58,16.51 180 bottom
C131  10u  [C1206/T]  68.58,19.05 0 bottom
C132  10n  [C0603]  100.65,24.13 270 bottom
C133  10n  [C0603]  96.52,24.13 270 bottom
C134  1n  [C0603]  39.37,30.48 270 bottom
C135  100p  [C0603]  41.27,32.38 270 bottom
C136  100n  [C0603]  95.25,34.29 270 bottom
C137  100n  [C0603]  93.34,34.29 270 bottom
C138  10n  [C0603]  91.44,34.29 270 bottom
C139  100n  [C0603]  89.53,34.29 270 bottom
C140  10n  [C0603]  87.63,34.29 270 bottom
C141  1n  [C0603]  39.37,34.29 270 bottom
C142  10n  [C0603]  71.44,34.92 0 bottom
C143  10u  [C1206/T]  84.45,35.56 270 bottom
C144  100n  [C0603]  60.33,35.88 0 bottom
C145  10u  [C1206/T]  100.33,36.2 180 bottom
C146  18p  [C0603]  135.89,37.47 0 bottom
C147  18p  [C0603]  132.08,37.47 180 bottom
C148  100n  [C0603]  66.04,37.78 90 bottom
C149  4.7u  [C1206/T]  38.73,38.1 180 bottom
C150  100n  [C0603]  57.47,38.73 90 bottom
C151  10n  [C0603]  101.6,39.37 180 bottom
C152  10n  [C0603]  82.55,40.01 0 bottom
C153  4.7u  [C1206]  134.62,40.96 180 bottom
C154  100n  [C0603]  101.6,41.27 180 bottom
C155  100n  [C0603]  82.55,41.91 0 bottom
C156  10n  [C0603]  155.57,42.55 0 bottom
C157  100n  [C0603]  101.6,43.18 0 bottom
C158  100n  [C0603]  68.26,43.18 270 bottom
C159  100n  [C0603]  82.55,43.81 0 bottom
C160  100n  [C0603]  57.47,43.81 270 bottom
C161  2.2u  [C1206]  124.14,45.09 90 bottom
C162  100n  [C0603]  60.64,46.67 180 bottom
C163  33n  [C0603]  140.97,46.99 0 bottom
C164  100n  [C0603]  136.53,46.99 90 bottom
C165  33n  [C0603]  134.62,46.99 90 bottom
C166  2.7n  [C0603]  130.81,46.99 90 bottom
C167  33n  [C0603]  128.91,46.99 90 bottom
C168  33n  [C0603]  119.38,46.99 0 bottom
C169  10u  [C1206/T]  83.82,47.62 0 bottom
C170  1n  [C0603]  39.37,48.26 270 bottom
C171  100n  [C0603]  15.88,48.26 180 bottom
C172  100n  [C0603]  140.97,48.9 0 bottom
C173  100n  [C0603]  119.38,48.9 0 bottom
C174  100p  [C0603]  41.27,50.16 270 bottom
C175  330p  [C0603]  21.91,50.16 180 bottom
C176  2200p  [C0603]  18.1,50.16 0 bottom
C177  2200p  [C0603]  13.65,50.16 180 bottom
C178  330p  [C0603]  9.84,50.16 0 bottom
C179  33n  [C0603]  127,51.44 180 bottom
C180  1n  [C0603]  39.37,52.07 270 bottom
C181  2.2u  [C1206]  141.6,53.02 0 bottom
C182  2.7n  [C0603]  127,53.34 180 bottom
C183  100n  [C0603]  98.42,53.34 90 bottom
C184  10n  [C0603]  96.52,53.34 90 bottom
C185  10n  [C0603]  92.71,53.34 90 bottom
C186  100n  [C0603]  90.81,53.34 90 bottom
C187  100n  [C0603]  87,53.34 90 bottom
C188  100n  [C0603]  140.97,55.24 0 bottom
C189  33n  [C0603]  127,55.24 180 bottom
C190  4.7u  [C1206/T]  38.73,55.88 180 bottom
C191  33n  [C0603]  140.97,57.15 0 bottom
C192  2.7n  [C0603]  127,57.15 180 bottom
C193  10n  [C0603]  80.01,58.42 270 bottom
C194  2.7n  [C0603]  140.97,59.05 0 bottom
C195  10n  [C0603]  157.48,59.69 270 bottom
C196  470p  [C0603]  136.53,60.96 270 bottom
C197  33n  [C0603]  134.62,60.96 270 bottom
C198  100n  [C0603]  132.72,60.96 270 bottom
C199  2.7n  [C0603]  128.91,60.96 270 bottom
C200  33n  [C0603]  127,60.96 270 bottom
C201  100n  [C1206]  104.14,62.23 270 bottom
C202  10u  [C1206/T]  100.97,62.23 270 bottom
C203  4.7u  [C1206]  133.35,64.77 0 bottom
C204  100n  [C0603]  141.6,65.41 90 bottom
C205  33n  [C0603]  139.7,65.41 90 bottom
C206  2.2u  [C1206]  137.32,66.2 90 bottom
C207  33n  [C0603]  124.46,67.94 90 bottom
C208  100n  [C0603]  122.56,67.94 90 bottom
C209  330p  [C0603]  46.35,68.26 270 bottom
C210  4.7u  [C1206/T]  74.93,69.85 0 bottom
C211  4.7u  [C1206/T]  63.5,69.85 0 bottom
C212  2200p  [C0603]  46.35,72.07 90 bottom
C213  1n  [C0603]  74.3,73.66 90 bottom
C214  1n  [C0603]  62.87,73.66 90 bottom
C215  100n  [C0603]  48.26,74.3 90 bottom
C216  100p  [C0603]  72.39,75.56 90 bottom
C217  100p  [C0603]  60.96,75.56 90 bottom
C218  22u  [C6032-28/T]  146.05,81.92 0 bottom
C219  2200p  [C0603]  46.35,76.52 270 bottom
C220  1n  [C0603]  74.3,77.47 90 bottom
C221  1n  [C0603]  62.87,77.47 90 bottom
C222  100n  [C1206]  142.24,78.74 0 bottom
C223  100n  [C0603]  120.02,79.38 0 bottom
C224  330p  [C0603]  46.35,80.33 90 bottom
C225  10u  [C1206/T]  120.02,81.92 0 bottom
C226  100n  [C0603]  123.83,85.09 180 bottom
C227  10u  [C1206/T]  132.72,87.95 0 bottom
C228  220p  [C0603]  170.18,98.42 0 bottom
C229  100u  [C7343-43]  151.13,69.85 180 bottom
D1  MBR0520L  [SOD123]  170.18,87 0 top
D2  zhcs1000  [SOT23]  97.16,66.67 180 top
D13  MBRS360T3  [SMC]  160.66,79.38 90 bottom
D14  MBRS360T3  [SMC]  149.22,90.81 180 bottom
DSP1  BF533  [LQFP176]  92.08,43.81 270 top
GND  TPS-SMD-20R  [SMD-20R]  113.67,63.5 0 top
H1  MOUNT440  [120-PAD-NS]  3.17,105.41 0 top
H2  MOUNT440  [120-PAD-NS]  97.79,105.41 0 top
H3  MOUNT440  [120-PAD-NS]  170.81,105.41 0 top
H10  MOUNT440  [120-PAD-NS]  3.17,3.17 0 top
H11  MOUNT440  [120-PAD-NS]  97.79,3.17 0 top
H12  MOUNT440  [120-PAD-NS]  170.81,3.17 0 top
IC2  AD8606  [SO8]  63.5,75.56 0 top
IC3  AD8606  [SO8]  74.93,75.56 0 top
IC4  AD8606  [SO8]  50.16,74.3 0 top
IC5  AD8606  [SO8]  11.43,70.17 270 top
IC8  AD8606  [SO8]  53.34,52.7 0 top
IC9  AD8606  [SO8]  38.73,50.16 180 top
IC10  AD8606  [SO8]  15.88,46.35 270 top
IC12  AD8606  [SO8]  38.73,32.38 180 top
J1  STEREOSW3GND  [NEUTRIK-NRJ6HF-1]  15.24,110.49 180 top
J2  NSJ12HF  [NSJ12HF]  33.02,110.49 90 top
J3  NSJ12HF  [NSJ12HF]  50.8,110.49 90 top
J4  NSJ12HF  [NSJ12HF]  68.58,110.49 90 top
J5  NSJ12HF  [NSJ12HF]  86.36,110.49 90 top
J6  SJ1-3533NG  [SJ1-3533NG]  109.86,107.95 270 top
J7  [USB_B]  133.99,100.33 180 top
J8  PJ-102AH/BH  [PJ-102XH]  149.22,96.52 180 top
J9  PHA2U  [PHA2U]  159.38,94.61 180 top
J11  USBA-VERT  [USBA-VERT]  121.28,92.08 180 top
J20  F-2X03-DIL-100  [DIL-100-2X03]  62.87,24.77 0 top
J21  STEREOSW3GND  [NEUTRIK-NRJ6HF-1]  15.24,0 0 top
J22  STEREOSW3GND  [NEUTRIK-NRJ6HF-1]  33.02,0 0 top
JP2  AVR-JTAG  [AVR-JTAG-10]  121.92,11.43 0 top
JP3  JPQ-07-100  [JPQ-07]  81.28,5.08 0 top
L1  XAL7030-103  [XAL7030-103]  169.54,92.39 0 top
L2  600  [L0603]  95.89,83.82 0 top
L3  600  [L0603]  95.89,80.64 0 top
L4  MSS1278  [MSS1278]  160.66,79.38 180 top
L6  600  [L0603]  67.94,75.56 90 top
L7  600  [L0603]  79.38,75.56 90 top
L8  SRR6038-100Y  [SRR6038]  90.81,65.41 270 top
L9  600  [L0603]  34.29,50.16 270 top
L10  600  [L0603]  34.29,32.38 270 top
LED1  [CHIPLED_0805]  89.53,73.03 180 top
LED2  [CHIPLED_0805]  91.44,73.03 180 top
LED12  [CHIPLED_0805]  133.35,3.81 0 top
P1  M-1X05-SIP-100-32  [SIP-100-05-32]  97.79,93.98 90 top
P6  F-2X06-DIL-100  [DIL-100-2X06]  15.88,59.05 0 top
P8  M-2X14-DIL-100  [DIL-100-2X14]  170.18,31.11 270 top
P12  M-1X03-SIP-100-40  [SIP-100-03-40]  60.96,6.35 180 top
R7  47k  [R0603]  113.03,93.98 270 top
R13  47k  [R0603]  113.03,90.17 90 top
R15  120  [R0603]  23.5,83.82 270 top
R16  120  [R0603]  25.4,83.82 270 top
R17  120  [R0603]  29.84,83.82 270 top
R18  120  [R0603]  36.2,83.82 270 top
R19  120  [R0603]  38.1,83.82 270 top
R20  120  [R0603]  41.91,83.82 270 top
R21  11k  [R0603]  48.9,83.19 0 top
R22  5k49  [R0603]  52.39,83.19 180 top
R23  5k76  [R0603]  62.23,82.55 180 top
R24  5k76  [R0603]  66.04,82.55 0 top
R25  5k76  [R0603]  73.66,82.55 180 top
R26  5k76  [R0603]  77.47,82.55 0 top
R27  750k  [R0603]  68.9,81.6 270 top
R28  750k  [R0603]  80.33,81.6 270 top
R29  3k32  [R0603]  48.9,81.28 180 top
R30  1k65  [R0603]  52.39,81.28 180 top
R31  5k49  [R0603]  46.35,80.33 90 top
R32  20k  [R0603]  4.45,79.38 270 top
R33  20k  [R0603]  6.35,79.38 90 top
R34  20k  [R0603]  16.51,78.11 270 top
R35  20k  [R0603]  18.41,78.11 90 top
R36  2k74  [R0603]  55.24,77.47 270 top
R37  150  [R0603]  89.53,76.83 90 top
R38  150  [R0603]  91.44,76.83 90 top
R39  604  [R0603]  46.35,76.52 270 top
R40  0  [R0603]  132.08,75.25 90 top
R41  0  [R0603]  134.62,75.25 90 top
R42  0  [R0603]  137.16,75.25 90 top
R43  0  [R0603]  106.68,73.03 180 top
R44  604  [R0603]  46.35,72.07 90 top
R45  3k32  [R0603]  108.27,71.12 0 top
R46  0  [R0603]  106.68,69.22 180 top
R47  5k76  [R0603]  62.23,68.58 0 top
R48  5k76  [R0603]  66.04,68.58 0 top
R49  5k76  [R0603]  73.66,68.58 0 top
R50  5k76  [R0603]  77.47,68.58 0 top
R51  5k49  [R0603]  46.35,68.26 270 top
R52  3k32  [R0603]  48.9,67.31 180 top
R53  1k65  [R0603]  52.39,67.31 180 top
R54  2k74  [R0603]  55.24,67.31 270 top
R55  0  [R0603]  106.68,67.31 180 top
R70  11k  [R0603]  48.9,65.41 0 top
R71  5k49  [R0603]  52.39,65.41 180 top
R72  0  [R0603]  88.27,60.33 180 top
R75  5k76  [R0603]  36.2,57.15 180 top
R76  5k76  [R0603]  40.01,57.15 180 top
R81  5k49  [R0603]  9.84,50.16 180 top
R82  604  [R0603]  13.65,50.16 0 top
R83  604  [R0603]  18.1,50.16 180 top
R84  5k49  [R0603]  21.91,50.16 0 top
R89  11k  [R0603]  6.99,47.62 270 top
R90  3k32  [R0603]  8.89,47.62 90 top
R91  3k32  [R0603]  22.86,47.62 90 top
R92  11k  [R0603]  24.77,47.62 270 top
R96  5k49  [R0603]  6.99,44.13 90 top
R97  1k65  [R0603]  8.89,44.13 90 top
R98  1k65  [R0603]  22.86,44.13 90 top
R99  5k49  [R0603]  24.77,44.13 90 top
R100  750k  [R0603]  33.34,44.13 90 top
R102  5k76  [R0603]  36.2,43.18 180 top
R103  5k76  [R0603]  40.01,43.18 0 top
R111  2k74  [R0603]  8.89,41.27 180 top
R112  2k74  [R0603]  19.05,41.27 180 top
R116  5k76  [R0603]  36.2,39.37 180 top
R117  5k76  [R0603]  40.01,39.37 180 top
R118  33  [R0603]  71.44,36.51 0 top
R126  562  [R0603]  54.29,33.02 180 top
R129  750k  [R0603]  33.34,26.35 90 top
R130  5k76  [R0603]  36.2,25.4 180 top
R131  5k76  [R0603]  40.01,25.4 0 top
R134  100k  [R0603]  133.35,18.41 180 top
R137  100k  [R0603]  133.35,16.51 180 top
R138  100k  [R0603]  133.35,14.61 180 top
R139  100k  [R0603]  133.35,12.7 180 top
R140  0  [R0603]  79.38,10.79 270 top
R141  100k  [R0603]  133.35,10.79 180 top
R142  18k  [R0603]  46.35,9.53 0 top
R143  4k7  [R0603]  71.75,9.53 270 top
R144  0  [R0603]  73.66,9.53 270 top
R145  4k7  [R0603]  75.56,9.53 270 top
R146  100k  [R0603]  133.35,8.89 180 top
R155  82k  [R0603]  46.35,7.62 0 top
R156  82k  [R0603]  46.35,5.71 0 top
R157  18k  [R0603]  46.35,3.81 0 top
R158  150  [R0603]  130.81,3.81 90 top
R159  10k  [R0603]  113.03,2.54 270 top
R160  22  [R0603]  105.09,24.13 90 bottom
R161  10k  [R0603]  85.72,26.67 270 bottom
R162  10k  [R0603]  83.82,26.67 270 bottom
R163  237  [R0603]  37.47,30.48 270 bottom
R164  237  [R0603]  37.47,34.29 90 bottom
R165  10k  [R0603]  71.44,36.51 0 bottom
R166  10k  [R0603]  64.14,37.78 90 bottom
R167  39  [R0603]  119.38,43.18 0 bottom
R168  39  [R0603]  119.38,45.09 0 bottom
R169  10k  [R0603]  101.6,46.04 0 bottom
R170  10k  [R0603]  101.6,47.94 0 bottom
R171  237  [R0603]  37.47,48.26 270 bottom
R172  237  [R0603]  37.47,52.07 90 bottom
R173  100k  [R0603]  82.55,52.39 180 bottom
R174  49k9  [R0603]  19.05,52.7 0 bottom
R175  49k9  [R0603]  12.7,52.7 180 bottom
R176  10k  [R0603]  82.55,54.29 0 bottom
R177  0  [R0603]  136.53,56.2 270 bottom
R178  33  [R0603]  81.92,58.42 90 bottom
R179  10k  [R0603]  78.11,58.42 90 bottom
R180  0  [R0603]  140.97,60.96 180 bottom
R181  49k9  [R0603]  43.81,71.12 90 bottom
R182  237  [R0603]  76.2,73.66 270 bottom
R183  237  [R0603]  64.77,73.66 270 bottom
R184  237  [R0603]  76.2,77.47 90 bottom
R185  237  [R0603]  64.77,77.47 90 bottom
R186  49k9  [R0603]  43.81,77.47 270 bottom
R187  18k  [R0603]  159.38,87 180 bottom
R188  47k  [R0603]  155.57,87 0 bottom
R189  22  [R0603]  129.54,93.34 90 bottom
R190  22  [R0603]  127.64,93.34 270 bottom
R191  1k  [R0603]  163.19,95.25 270 bottom
R192  118k  [R0603]  170.18,96.52 0 bottom
R193  10k  [R0603]  159.38,99.69 0 bottom
R194  13k3  [R0603]  170.18,100.33 180 bottom
R195  10k  [R0603]  115.25,104.78 90 bottom
R196  10k  [R0603]  116.84,104.78 90 bottom
S1  SDMMC06132  [06132]  150.5,25.4 0 top
SW1  PANASONIC-EVQ  [PANASONIC-EVQ]  109.86,4.45 270 top
TP-GND  [1X01]  165.1,107.31 0 top
U1  BAS70-04  [SOT23]  102.23,101.6 270 top
U2  LMR62014  [SOT23-5]  170.18,98.42 90 top
U3  BAS70-04  [SOT23]  102.23,97.79 270 top
U4  TPS2020  [SO08]  109.22,92.08 0 top
U5  LM2678  [TO263-7]  146.69,85.72 0 top
U6  ATMEGA32U4-AU  [TQFP44]  121.92,82.55 0 top
U7  ADP3339  [SOT223]  134.62,81.6 180 top
U8  TPA6111A2  [SO08]  11.43,78.11 270 top
U9  ADP3339  [SOT223]  97.16,73.03 90 top
U10  FDS9431A  [SO08]  101.6,62.23 0 top
U15  AT32UC3A0512  [LQFP144]  133.99,53.98 180 top
U16  CY62167EV30-Z  [TSOP48]  158.12,53.98 0 top
U17  AD1939  [SQFP-S-10X10-64]  62.87,41.27 0 top
U23  MT48LC32M16A2tg-75  [TSOP54]  102.23,18.41 0 top
U24  AD5686R  [TSSOP16]  68.58,17.78 270 top
U26  SN74LVC2G14  [SOT23-6]  51.44,3.81 270 top
VDDINT  TPS-SMD-10R  [SMD-10R]  93.34,60.33 0 top
VDDOUT  TPS-SMD-10R  [SMD-10R]  136.21,66.67 180 top
X1  16mhz  [NX5032]  121.6,74.3 0 bottom
Y1  ASFL1-27mhz  [ASFL1]  80.01,60.96 0 top
Y2  12mhz  [HC49UP@1]  133.99,34.92 0 top
Y3  ASFL1-12.288mhz  [ASFL1]  70.17,33.02 0 top

## Library data of the parts
3V3 3V3C 5V GND VDDINT VDDOUT = testpoint
BM1 BM2 C1 C3-C42 C51 C52 C61 C62 C65-C67 C69 C71-C73 C77-C80 C85 C86 C93 C94 C96 C97 C102 C103 C106 C107 C111 C113 C123-C229 L2 L3 L6 L7 L9 L10 R7 R13 R15-R55 R70-R72 R75 R76 R81-R84 R89-R92 R96-R100 R102 R103 R111 R112 R116-R118 R126 R129-R131 R134 R137-R146 R155-R196 = rc-master-smd
D1 D2 D13 D14 U1 U3 = diode
DSP1 J1-J9 J11 J21 J22 L1 S1 SW1 U2 U4-U10 U17 U23 U24 U26 X1 = monome-inc
H1-H3 H10-H12 = monome-inc; BOM: EXCLUDE
IC2-IC5 IC8-IC10 IC12 = analog-devices; MPN: AD8607ARMZ-R2; OC_FARNELL: 1651293; OC_NEWARK: 19M8927
J20 P1 P6 P8 P12 = con-headers-jp
JP2 U15 = atmel-avr32
JP3 = jumpers
L4 = inductor-coilcraft
L8 = inductor-bourns
LED1 LED2 LED12 = led
TP-GND = pinhead
U16 = memory-cypress
Y1-Y3 = crystal

## Nets
+3V3: 3V3.TP C111.1 C156.1 C195.1 JP2.4 LED12.A P8.3 R40.1 R134.2 R137.2 R138.2 R139.2 R141.2 R146.2 R159.2 R195.1 R196.1 S1.4 U1.2 U3.2 U16.12 U16.37 U16.47
+3V3A: C14.+ C17.2 C19.2 C67.2 C78.2 C102.1 C107.2 C144.1 C150.1 C160.1 C162.1 C171.2 C215.2 IC2.8 IC3.8 IC4.8 IC8.8 IC9.8 IC10.8 IC12.8 L2.1 R126.2 U17.5 U17.45 U17.51 U17.62
+3V3C: 3V3C.TP C125.2 C126.2 C127.2 C128.2 C129.2 C132.2 C133.2 C142.1 C148.1 C158.1 C193.1 L2.2 R37.2 R38.2 R43.1 R143.1 R161.2 R162.2 R165.2 R169.2 R170.2 R173.2 R179.2 U17.17 U17.31 U17.32 U23.1 U23.3 U23.9 U23.14 U23.27 U23.43 U23.49 U24.11 Y1.4 Y3.4
+5V: 5V.TP C1.1 C6.2 C23.2 C24.+ C28.+ C130.1 C131.+ C223.2 C225.+ C226.2 C227.+ C229.+ L1.P$1 L4.2 P8.4 R7.2 R13.2 R155.1 R156.1 U2.4 U2.5 U4.2 U4.3 U5.6 U6.2 U6.14 U6.24 U6.34 U6.42 U6.44 U7.3 U9.3 U24.5 U24.10 U26.5
+5VA: C8.+ C15.2 C32.2 IC5.8 P6.6 U8.8
+12V: C10.+ C228.2 D1.C P8.2 R192.2
A-A1: U15.118 U16.25
A-A2: U15.114 U16.24
A-A3: U15.112 U16.23
A-A4: U15.110 U16.22
A-A5: U15.107 U16.21
A-A6: U15.105 U16.20
A-A7: U15.103 U16.19
A-A8: U15.101 U16.18
A-A9: U15.99 U16.8
A-A10: U15.97 U16.7
A-A11: U15.95 U16.6
A-A12: U15.91 U16.5
A-A13: U15.89 U16.4
A-A14: U15.87 U16.3
A-A15: U15.67 U16.2
A-A16: U15.65 U16.1
A-A17: U15.63 U16.48
A-A18: U15.61 U16.17
A-A19: U15.59 U16.16
A-D0: U15.38 U16.29
A-D1: U15.35 U16.31
A-D2: U15.33 U16.33
A-D3: U15.31 U16.35
A-D4: U15.26 U16.38
A-D5: U15.24 U16.40
A-D6: U15.12 U16.42
A-D7: U15.10 U16.44
A-D8: U15.4 U16.30
A-D9: U15.2 U16.32
A-D10: U15.1 U16.34
A-D11: U15.144 U16.36
A-D12: U15.142 U16.39
A-D13: U15.140 U16.41
A-D14: U15.137 U16.43
A-D15: U15.135 U16.45
A-INT: DSP1.P$32 U15.5
A-RESET: C123.1 JP2.6 R159.1 SW1.2 U15.23
A-TCK: JP2.1 U15.129
A-TDI: JP2.9 U15.131
A-TDO: JP2.3 U15.130
A-TMS: JP2.5 U15.128
ABE0_: DSP1.P$151 U23.15
ABE1_: DSP1.P$150 U23.39
AD1939_RESET: DSP1.P$50 R166.1 U17.14
AGND: C8.- C11.2 C12.2 C14.- C15.1 C16.2 C17.1 C19.1 C22.1 C26.1 C32.1 C36.2 C38.1 C40.1 C42.1 C61.1 C67.1 C69.- C71.1 C78.1 C79.- C80.1 C85.1 C86.1 C93.2 C94.2 C96.1 C107.1 C130.2 C131.- C134.1 C141.2 C144.2 C150.2 C160.2 C162.2 C170.1 C171.1 C175.1 C176.1 C177.1 C178.1 C180.2 C209.1 C212.1 C213.2 C214.2 C215.1 C219.1 C220.1 C221.1 C224.1 IC2.4 IC3.4 IC4.4 IC5.4 IC8.4 IC9.4 IC10.4 IC12.4 J1.RN J1.SN J1.TN J2.G J2.RNB J2.RNT J2.RT J2.SB J2.SNB J2.SNT J2.ST J2.TNB J2.TNT J3.G J3.RNB J3.RNT J3.RT J3.SB J3.SNB J3.SNT J3.ST J3.TNB J3.TNT J4.RB J4.RNB J4.RNT J4.RT J4.SB J4.SNB J4.SNT J4.ST J4.TNB J4.TNT J5.G J5.RB J5.RNB J5.RNT J5.RT J5.SB J5.SNB J5.SNT J5.ST J5.TNB J5.TNT J20.1 J20.2 L3.1 P6.8 R17.2 R18.2 R27.2 R28.2 R100.2 R129.2 R174.2 R175.2 R181.2 R186.2 U8.4 U8.5 U17.1 U17.4 U17.44 U17.46 U17.48 U24.4 U24.16
B-A1: DSP1.P$149 U23.23
B-A2: DSP1.P$148 U23.24
B-A3: DSP1.P$147 U23.25
B-A4: DSP1.P$146 U23.26
B-A5: DSP1.P$142 U23.29
B-A6: DSP1.P$141 U23.30
B-A7: DSP1.P$140 U23.31
B-A8: DSP1.P$139 U23.32
B-A9: DSP1.P$138 U23.33
B-A10: DSP1.P$137 U23.34
B-A12: DSP1.P$135 U23.35
B-A13: DSP1.P$127 U23.36
B-A18: DSP1.P$122 U23.20
B-A19: DSP1.P$121 U23.21
B-D0: DSP1.P$116 U23.2
B-D1: DSP1.P$115 U23.4
B-D2: DSP1.P$114 U23.5
B-D3: DSP1.P$113 U23.7
B-D4: DSP1.P$112 U23.8
B-D5: DSP1.P$110 U23.10
B-D6: DSP1.P$109 U23.11
B-D7: DSP1.P$108 U23.13
B-D8: DSP1.P$105 U23.42
B-D9: DSP1.P$104 U23.44
B-D10: DSP1.P$103 U23.45
B-D11: DSP1.P$102 U23.47
B-D12: DSP1.P$101 U23.48
B-D13: DSP1.P$100 U23.50
B-D14: DSP1.P$99 U23.51
B-D15: DSP1.P$98 U23.53
B-HWAIT: DSP1.P$49 R176.2 U15.39
B-INT: DSP1.P$29 U15.3
B-MISO: DSP1.P$54 U15.50
B-MOSI: DSP1.P$55 U15.53
B-RESET: DSP1.P$13 U15.41
B-SCK: DSP1.P$53 U15.54
B-SPISEL4: DSP1.P$47
B-SPISS: DSP1.P$51 R173.1 U15.48
BMODE0: BM2.2 DSP1.P$96 R161.1
BMODE1: BM1.2 DSP1.P$95 R162.1
CLKIN: DSP1.P$10 R178.1
CLKOUT: DSP1.P$169 R160.2
CS1: U15.46 U16.26
CTS: U6.12 U15.34
CVOUT1: J20.6 U24.3
CVOUT2: J20.4 U24.2
CVOUT3: J20.5 U24.6
CVOUT4: J20.3 U24.7
DAC-LDAC: DSP1.P$37 U24.9
DAC-RESET: DSP1.P$38 U24.15
DM: J11.2 R168.2
DP: J11.3 R167.2
DR0PRI: DSP1.P$74 U17.27
DR0SEC: DSP1.P$73 U17.26
DT0PRI: DSP1.P$68 U17.20
DT0SEC: DSP1.P$67 U17.19
DT1PRI: DSP1.P$59
DT1SEC: DSP1.P$58 U24.14
EMU_: DSP1.P$83 R144.1
ENC0A: P8.13 U15.98
ENC0B: P8.14 U15.96
ENC1A: P8.11 U15.102
ENC1B: P8.12 U15.100
ENC2A: P8.9 U15.106
ENC2B: P8.10 U15.104
ENC3A: P8.7 U15.113
ENC3B: P8.8 U15.111
GND: BM1.1 BM2.1 C1.2 C3.- C4.1 C5.- C6.1 C10.- C13.1 C23.1 C24.- C28.- C29.1 C30.1 C34.- C51.- C52.- C111.2 C113.1 C123.2 C124.1 C125.1 C126.1 C127.1 C128.1 C129.1 C132.1 C133.1 C136.1 C137.1 C138.1 C139.1 C140.1 C142.2 C143.- C145.- C146.2 C147.2 C148.2 C151.1 C152.1 C153.2 C154.1 C155.1 C156.2 C157.1 C158.2 C159.1 C161.2 C163.2 C164.2 C165.2 C166.2 C167.2 C168.2 C169.- C172.2 C173.2 C179.2 C181.2 C182.2 C183.1 C184.1 C185.1 C186.1 C187.1 C188.2 C189.2 C191.2 C192.2 C193.2 C194.2 C195.2 C196.2 C197.2 C198.2 C199.2 C200.2 C201.1 C202.- C203.2 C204.2 C205.2 C206.2 C207.2 C208.2 C218.- C222.1 C223.1 C225.- C226.1 C227.- C229.- D2.1 D13.A DSP1.P$1 DSP1.P$2 DSP1.P$3 DSP1.P$7 DSP1.P$8 DSP1.P$9 DSP1.P$14 DSP1.P$15 DSP1.P$17 DSP1.P$19 DSP1.P$30 DSP1.P$39 DSP1.P$40 DSP1.P$41 DSP1.P$42 DSP1.P$43 DSP1.P$44 DSP1.P$56 DSP1.P$70 DSP1.P$88 DSP1.P$89 DSP1.P$90 DSP1.P$91 DSP1.P$92 DSP1.P$97 DSP1.P$106 DSP1.P$117 DSP1.P$128 DSP1.P$129 DSP1.P$130 DSP1.P$131 DSP1.P$132 DSP1.P$133 DSP1.P$144 DSP1.P$155 DSP1.P$170 DSP1.P$174 DSP1.P$175 DSP1.P$176 GND.TP J6.1 J7.GND J8.2 J9._1 J11.4 J11.G1 J11.G2 J11.G3 J11.G4 J21.R J21.RN J21.SN J21.TN J22.R J22.RN J22.SN J22.TN JP2.2 JP2.10 JP3.1 JP3.4 JP3.7 JP3.9 JP3.11 JP3.13 L3.2 P1.1 P8.1 P8.5 P8.6 P12.1 R45.2 R145.2 R158.1 R166.2 R176.1 R187.2 R193.2 R194.1 S1.3 S1.6 S1.GP SW1.1 TP-GND.1 U1.1 U2.2 U3.1 U4.1 U5.4 U5.8 U6.5 U6.15 U6.23 U6.35 U6.43 U7.1 U9.1 U15.8 U15.18 U15.28 U15.37 U15.52 U15.72 U15.73 U15.82 U15.83 U15.85 U15.86 U15.94 U15.109 U15.117 U15.132 U15.133 U16.27 U16.46 U17.16 U17.23 U17.24 U17.25 U17.30 U17.33 U17.34 U17.35 U23.6 U23.12 U23.28 U23.41 U23.46 U23.52 U23.54 U26.2 Y1.2 Y3.2
HBE: U15.40 U16.14
HPL: IC5.5 P6.1
HPL-J: C9.- J1.R
HPR: IC5.3 P6.3
HPR-J: C7.- J1.T
IN1L: L9.2 P6.9
IN1L+: C170.2 C174.2 R171.1 U17.53
IN1L-: C174.1 C180.1 R172.1 U17.54
IN1L-J: C11.1 P6.10 R16.2
IN1R: L10.2 P6.11
IN1R+: C134.2 C135.2 R163.1 U17.55
IN1R-: C135.1 C141.1 R164.1 U17.56
IN1R-J: C12.1 P6.12 R20.2
IN2-L: J4.TT L6.2
IN2-R: J5.TT L7.2
IN2L+: C217.2 C221.2 R185.1 U17.57
IN2L-: C214.1 C217.1 R183.1 U17.58
IN2R+: C216.2 C220.2 R184.1 U17.59
IN2R-: C213.1 C216.1 R182.1 U17.60
KEY0: P8.18 U15.77
KEY1: P8.17 U15.78
KEY2: P8.16 U15.79
KEY3: P8.15 U15.80
LBE: U15.120 U16.15
MMC-DETECT: R134.1 S1.CD U15.88
MMC-PROTECT: R137.1 S1.WP U15.90
MODE-KEY: P8.19 U15.76
MODE-LED: P8.20 U15.75
N$3: D14.A J8.1
N$4: C146.1 U15.124 Y2.2
N$5: C147.1 U15.125 Y2.1
N$6: J7.DM R189.2
N$7: C27.1 D13.C L4.1 U5.1
N$9: C27.2 U5.3
N$12: J7.DP R190.1
N$13: R190.2 U6.4
N$14: P1.2 U6.11
N$15: LED12.C R158.2
N$16: C34.+ R43.2 R46.2 R55.2 U9.2 U9.4
N$17: R189.1 U6.3
N$18: C52.+ C201.2 C202.+ R55.1 U10.1 U10.2 U10.3
N$19: D2.3 L8.1 U10.5 U10.6 U10.7 U10.8
N$22: C51.+ L8.2 R72.2
N$24: R160.1 U23.38
N$25: R179.1 Y1.1
N$26: JP3.2 R144.2
N$28: JP3.5 R143.2
N$29: DSP1.P$163 R170.1
N$31: JP3.14 R140.2
N$32: C5.+ R40.2 R41.2 R42.2 U7.2 U7.4
N$35: DSP1.P$162 R169.1
N$36: R165.1 Y3.1
N$38: R178.2 Y1.3
N$44: R168.1 U15.70
N$45: R167.1 U15.71
N$50: J9.1 R193.1
N$53: C190.+ R75.2
N$54: C124.2 R157.2 U26.3
N$55: J9.2 R187.1 R188.1
N$57: R118.2 Y3.3
N$59: R118.1 U17.2
N$60: DSP1.P$27 LED2.C
N$61: C69.+ C71.2 IC8.3 U17.47
N$62: C79.+ C80.2 U17.52
N$63: C102.2 C103.2 U17.61
N$64: DSP1.P$28 LED1.C
N$65: C103.1 R126.1
N$66: LED2.A R38.1
N$67: LED1.A R37.1
N$68: C178.2 R81.2 R89.1 R90.2
N$69: C93.1 R96.1 R97.1 R111.1
N$70: C85.2 IC10.3 R97.2
N$71: C72.2 IC10.1 R81.1 R82.1
N$72: C65.+ C177.2 R82.2
N$73: C175.2 R84.2 R91.2 R92.1
N$74: C72.1 IC10.2 R90.1
N$75: C94.1 R98.1 R99.1 R112.1
N$76: C86.2 IC10.5 R98.2
N$77: C73.2 IC10.7 R83.1 R84.1
N$78: C66.+ C176.2 R83.2
N$79: C73.1 IC10.6 R91.1
N$80: C209.2 R51.2 R52.2 R70.1
N$81: C36.1 R53.1 R54.1 R71.1
N$82: C42.2 IC4.3 R53.2
N$83: C41.2 IC4.1 R44.1 R51.1
N$84: C35.+ C212.2 R44.2
N$85: C41.1 IC4.2 R52.1
N$86: C224.2 R21.1 R29.2 R31.2
N$87: C16.1 R22.1 R30.1 R36.1
N$88: C22.2 IC4.5 R30.2
N$92: C21.2 IC4.7 R31.1 R39.1
N$94: C25.+ C219.2 R39.2
N$95: C21.1 IC4.6 R29.1
N$96: C97.1 IC12.1 R117.1 R131.2 R164.2
N$97: C106.1 IC12.7 R130.1 R163.2
N$98: C96.2 C149.- L10.1
N$99: C97.2 IC12.2 R116.1 R117.2
N$100: C106.2 IC12.6 R129.1 R130.2 R131.1
N$101: C149.+ R116.2
N$104: C62.1 IC9.1 R76.1 R103.2 R172.2
N$105: C77.1 IC9.7 R102.1 R171.2
N$106: C61.2 C190.- L9.1
N$107: C26.2 U8.3
N$108: C62.2 IC9.2 R75.1 R76.2
N$109: C29.2 U6.16 X1.P$1
N$110: C77.2 IC9.6 R100.1 R102.2 R103.1
N$111: C31.2 IC5.1 IC5.2
N$112: C30.2 U6.17 X1.P$2
N$113: C33.2 IC5.6 IC5.7
N$114: C33.1 R35.2
N$115: C31.1 R32.1
N$120: P1.3 U6.10
N$121: P1.4 U6.9
N$122: J3.TB R19.1
N$123: C37.1 IC2.1 R23.2 R47.1 R183.2
N$124: C113.2 R142.2 U26.1
N$125: C18.1 IC2.7 R24.1 R185.2
N$126: C38.2 C211.- L6.1
N$127: C37.2 IC2.2 R47.2 R48.1
N$128: C18.2 IC2.6 R23.1 R24.2 R27.1
N$129: C211.+ R48.2
N$130: J3.RB R18.1
N$131: IC8.6 IC8.7
N$133: D1.A L1.P$2 U2.1
N$134: C228.1 R192.1 R194.2 U2.3
N$140: J2.TB R15.1
N$141: R32.2 R33.1 U8.2
N$142: C39.1 IC3.1 R25.2 R49.1 R182.2
N$143: C20.1 IC3.7 R26.1 R184.2
N$144: C40.2 C210.- L7.1
N$145: C39.2 IC3.2 R49.2 R50.1
N$146: C20.2 IC3.6 R25.1 R26.2 R28.1
N$147: C210.+ R50.2
N$148: C7.+ R33.2 U8.1
N$150: R34.2 R35.1 U8.6
N$154: C9.+ R34.1 U8.7
N$155: DSP1.P$81 P12.3
N$156: J2.RB R17.1
N$157: J3.TT R20.1
N$160: C13.2 U6.6
N$161: J7.VCC U6.7
N$170: J2.TT R16.1
N$183: DSP1.P$82 P12.2
OLED-DC: P8.21 U15.47
OLED-RES: P8.22 U15.43
OUT1L: C66.- P6.5 R174.1
OUT1L+: R99.2 U17.36
OUT1L-: R92.2 U17.37
OUT1L-J: P6.2 R15.2
OUT1R: C65.- P6.7 R175.1
OUT1R+: R96.2 U17.38
OUT1R-: R89.2 U17.39
OUT1R-J: P6.4 R19.2
OUT2-L: C25.- J4.TB R186.1
OUT2-R: C35.- J5.TB R181.1
OUT2L+: R22.2 U17.40
OUT2L-: R21.2 U17.41
OUT2R+: R71.2 U17.42
OUT2R-: R70.2 U17.43
POWER_CON: R191.2 U15.134
POWER_ON: J9.0 R191.1 U5.7
POWER_SW: J9._0 U15.136
RD: U15.44 U16.28
RFS0: DSP1.P$69 DSP1.P$75 U17.22 U17.29
RSCLK0: DSP1.P$72 DSP1.P$76 U17.21 U17.28
RTS: U6.22 U15.32
RX: U6.21 U15.25
SA10: DSP1.P$164 U23.22
SCAS_: DSP1.P$166 U23.17
SCKE: DSP1.P$173 U23.37
SCL: J6.3 R195.2 U3.3 U15.123
SDA: J6.2 R196.2 U1.3 U15.122
SH-RCK: DSP1.P$34
SH-SCK: DSP1.P$35
SH-SER: DSP1.P$36
SMS_: DSP1.P$172 U23.19
SPI1-CS0: P8.23 U15.56
SPI1-CS1: P8.24 U15.62
SPI1-CS2: R146.1 S1.1 U15.64
SPI1-MISO: P8.26 R138.1 S1.7 U15.60
SPI1-MOSI: P8.27 R141.1 S1.2 U15.58
SPI1-SCK: P8.28 R139.1 S1.5 U15.57
SRAS_: DSP1.P$167 U23.18
SW0: U15.21 U26.4
SW0CON^: J22.T R142.1 R155.2
SW1: U15.22 U26.6
SW1CON^: J21.T R156.2 R157.1
SWE_: DSP1.P$165 U23.16
TCK: DSP1.P$94 JP3.8
TDI: DSP1.P$86 JP3.12
TDO: DSP1.P$87 R140.1
TFS1: DSP1.P$60 U24.13
TMS: DSP1.P$85 JP3.6
TRST_: DSP1.P$84 JP3.10 R145.1
TSCLK1: DSP1.P$61 U24.12
TX: U6.20 U15.27
U_RES: P1.5 U6.13
UNREG_IN: C218.+ C222.2 D14.C R188.2 U5.2
USB-OC: R7.1 U4.5 U15.66
USB-VBOF: R13.1 U4.4 U15.74
VBUS: C3.+ C4.2 J11.1 U4.6 U4.7 U4.8 U15.68
VDDCORE: C179.1 C181.1 C182.1 C188.1 C189.1 C191.1 C192.1 C194.1 C199.1 C200.1 R180.2 U15.29 U15.51 U15.55 U15.138
VDDEXT: C136.2 C139.2 C140.2 C143.+ C145.+ C151.2 C152.2 C154.2 C155.2 C169.+ C183.2 C184.2 C187.2 DSP1.P$6 DSP1.P$12 DSP1.P$18 DSP1.P$20 DSP1.P$31 DSP1.P$45 DSP1.P$57 DSP1.P$71 DSP1.P$93 DSP1.P$107 DSP1.P$118 DSP1.P$134 DSP1.P$145 DSP1.P$156 DSP1.P$171 R45.1 R46.1
VDDIN: C197.1 C198.1 C203.1 R41.1 U15.17
VDDINT: C137.2 C138.2 C157.2 C159.2 C185.2 C186.2 DSP1.P$25 DSP1.P$52 DSP1.P$66 DSP1.P$80 DSP1.P$111 DSP1.P$143 DSP1.P$157 DSP1.P$168 R72.1 VDDINT.TP
VDDIO: C153.1 C163.1 C164.1 C165.1 C168.1 C172.1 C173.1 C204.1 C205.1 C207.1 C208.1 R42.1 U15.7 U15.36 U15.69 U15.81 U15.92 U15.93 U15.108 U15.116
VDDOUT: C196.1 C206.1 R177.1 R180.1 U15.16 VDDOUT.TP
VDDSYS: C161.1 C166.1 C167.1 R177.2 U15.84
VREF: IC2.3 IC2.5 IC3.3 IC3.5 IC8.1 IC8.2 IC8.5 IC9.3 IC9.5 IC12.3 IC12.5 R36.2 R54.2 R111.2 R112.2
VROUT: DSP1.P$4 DSP1.P$5 U10.4
WE: U15.42 U16.11

## Tracks (layer width: path | path; a pad name or v marks a point on that pad's centre or on a via)
+3V3  (via drill 0.38, 0.6, 0.7)
  Top 0.152: v148.91,65.09 148.91,64.45 151.13,62.23 152.4,62.23 152.87,62.7 U16.47 | R134.2 R137.2 R138.2 R139.2 R141.2 R146.2 v131.44,8.89
  Top 0.254: U3.2 100.65,96.84 99.69,97.79 99.69,99.38 100.64,100.33 U1.2 101.28,100.65 107,100.65 109.22,102.87 v115.25,102.87 118.75,102.87 122.56,99.06 122.56,95.89 127,91.44 127,89.53 130.18,86.36 130.18,75.25 130.94,74.49 R40.1 | 3V3.TP v114.94,67.94 | U16.37 157.87,61.98 v157.48,61.59 | U16.12 157.87,42.93 v157.48,42.55 | v134.62,1.91 134.21,1.91 LED12.A | C111.1 119.38,14.73 JP2.4 | R159.2 113.03,1.91 v114.94,1.91
  Top 0.406: S1.4 149.9,22.19 v150.5,21.59
  Top 0.61: v132.08,73.03 R40.1
  Bottom 0.254: R196.1 R195.1 v115.25,102.87 | C195.1 v157.48,61.59 | C156.1 v157.48,42.55
  pour power (isolate 0.305): 135.25,73.03 135.25,75.56 133.99,76.83 113.67,76.83 112.39,75.56 114.94,73.03 114.94,0 173.99,0 173.99,110.49 156.84,110.49 156.84,70.48 155.57,69.22 147.96,69.22 147.96,41.27 145.41,38.73 123.83,38.73 120.02,42.55 120.02,64.14 123.83,67.94 130.18,67.94
+3V3A  (via drill 0.38, 0.6)
  Top 0.254: C102.1 v53.34,33.97 53.34,33.21 R126.2 | U17.51 58.31,44.02 v58.74,44.45 | U17.45 60.62,44.48 v60.64,44.45 | U17.62 58.53,38.52 v58.74,38.42 | U17.5 61.12,36.98 v61.28,37.15 | IC10.8 17.78,48.26 v16.51,46.99 | IC9.8 40.64,45.21 C78.2 v41.91,45.09 | IC4.8 48.26,76.2 v49.53,74.93 | IC12.8 40.64,27.43 C107.2 v41.91,27.3 | IC2.8 61.59,80.52 C17.2 v60.33,80.64 | IC3.8 73.03,80.52 C19.2 v71.75,80.64 | IC8.8 51.44,54.61 50.48,53.66 50.04,53.66 | 50.04,53.66 C67.2 | 50.04,53.66 49.85,53.66 v49.85,54.61
  Top 0.406: L2.1 v92.71,83.82 92.39,83.5 C14.+
  Bottom 0.254: C160.1 58.61,44.58 v58.74,44.45 | 59.88,46.55 C162.1 59.88,46.45 60.62,45.72 60.62,44.48 v60.64,44.45 | 57.66,37.97 C150.1 57.59,38.1 58.42,38.1 v58.74,38.42 | v61.28,37.15 61.28,36.07 C144.1 | v16.51,46.99 16.51,48.13 C171.2 | v49.53,74.93 48.39,74.93 C215.2
  pour power: 0,110.49 95.25,110.49 95.25,81.28 89.53,75.56 87,75.56 64.14,52.7 64.14,30.48 70.48,24.13 70.48,0 0,0
+3V3C  (via drill 0.38, 0.6)
  Top 0.152: v84.45,52.39 82.23,54.61 81.28,54.61 80.01,55.88 80.01,62.87 79.38,63.5 v78.74,63.5 | Y3.4 v68.9,35.88 | R143.1 v71.75,11.43 | v87,47.94 v99.69,47.94 | U24.11 74.64,16.8 v74.93,16.51 | U17.31 67.23,44.52 v66.99,44.77
  Top 0.254: U23.49 95.83,22.91 v96.52,22.23 | U23.43 100.64,22.24 v100.65,22.23 | U23.9 98.23,10.98 v98.74,10.48 | U23.14 102.23,11.11 v102.87,10.48 | U23.27 112.64,11.19 v113.35,10.48 | U23.1 91.83,11.67 92.39,11.11 93.66,11.11 | v93.66,10.48 93.66,11.11 | U23.3 93.44,11.85 C128.2 93.66,11.11 | v78.74,63.5 Y1.4 | v111.76,66.67 3V3C.TP | R38.2 R37.2 88.71,77.6 88.27,77.15 88.27,72.39 85.72,69.85 83.19,69.85 81.28,67.94 v81.28,66.67 | U17.17 68,37.52 v67.31,36.83 | U17.32 67.25,45.02 v66.99,44.77
  Top 0.406: v109.22,73.03 R43.1 107.31,73.15 107.31,73.66 105.41,75.56 105.41,81.6 103.19,83.82 L2.2
  Bottom 0.152: R173.2 v84.45,52.39 87,49.85 v87,47.94 | v68.9,35.88 69.53,36.51 R165.2 72.2,34.99 C142.1 | R169.2 R170.2 v99.69,47.94 | R162.2 R161.2 86.55,25.91 v87,26.35
  Bottom 0.254: C133.2 v96.52,22.23 | C132.2 v100.65,22.23 | C127.2 98.11,11.11 v98.74,10.48 | C126.2 102.23,11.11 v102.87,10.48 | C125.2 112.71,11.11 v113.35,10.48 | v93.66,10.48 C128.2 C129.2 | v78.74,63.5 78.74,60.96 78.11,60.33 R179.2 C193.1 | 66.17,36.83 C148.1 66.23,36.83 v67.31,36.83 | C158.1 68.14,43.94 67.63,44.45 67.31,44.45 v66.99,44.77
  pour power: 109.86,74.3 111.12,74.3 113.67,71.75 113.67,0 71.75,0 71.75,24.77 65.41,31.11 65.41,51.44 75.56,61.59 75.56,28.57 76.83,27.3 107.31,27.3 108.58,28.57 108.58,59.05 107.31,60.33 76.83,60.33 76.83,62.87 83.19,69.22 104.78,69.22
+5V  (via drill 0.38, 0.6, 0.7)
  Top 0.254: 113.03,93.34 R7.2 v113.03,92.08 R13.2 113.03,90.81 | U4.3 109.86,88.27 v109.22,87.63 108.58,88.27 U4.2 | R155.1 R156.1 v44.45,5.71 | v53.66,3.81 U26.5 | U24.5 v64.46,17.45 v64.45,17.46 | U24.10 69.5,16.16 v67.94,14.61 | U6.14 119.52,77.97 v119.38,78.11 | U6.24 128.88,79.35 v129.22,79.69 | U6.34 125.92,87.12 v125.73,87 | v114.62,85.41 114.96,85.75 U6.2 117.18,85.75 117.92,86.49 U6.44 117.92,89.34 118.11,89.53 119.38,89.53 119.52,89.39 U6.42 | 5V.TP 111.12,74.3 108.58,74.3 v107.31,75.56
  Top 0.406: C23.2 v98.74,78.11 | U9.3 100.25,78.03 C23.2 | C23.2 C24.+ | 168.91,99.41 U2.4 U2.5 167.64,97.47 167.32,97.79 C1.1 167,96.52 167,93.92 L1.P$1 167.26,90.42 165.74,88.9 165.74,88.27 161.29,83.82 | v171.45,10.79 173.35,12.7 173.35,43.18 P8.4
  Top 0.61: U7.3 132.31,86.13 131.44,87 C6.2 v131.44,90.17 | v168.28,76.83 161.29,83.82 160.71,83.82 L4.2 158.81,83.88 158.75,82.55 154.31,78.11 v153.03,78.11 149.86,78.11 149.22,78.74 U5.6
  Bottom 0.254: 66.86,17.46 v64.45,17.46 | 66.86,17.46 C130.1 67.94,16.51 v67.94,14.61 | C131.+ 67.31,17.91 66.86,17.46 | v119.38,78.11 119.38,79.25 C223.2 119.25,80.14 118.75,80.64 C225.+ | C226.2 124.59,85.85 v125.73,87
  Bottom 0.406: v44.45,5.71 51.75,5.71 | v171.45,10.79 161.29,0.64 104.78,0.64 99.06,6.35 96.52,6.35 90.81,0.64 54.61,0.64 53.66,1.59 v53.66,3.81 51.75,5.71 | 51.75,5.71 60.64,14.61 v67.94,14.61
  Bottom 0.61: v168.28,76.83 173.35,71.75 173.35,46.99 P8.4 | v131.44,90.17 C6.2
  Bottom 0.813: C229.+ C28.+ 154.31,76.83 v153.03,78.11
  pour power (isolate 0.305): 154.31,70.48 144.15,70.48 136.53,78.11 111.12,78.11 103.5,70.48 84.45,70.48 88.27,74.3 90.81,74.3 96.52,80.01 96.52,110.49 155.57,110.49 155.57,71.75
+5VA  (via drill 0.38)
  Top 0.254: C8.+ 12.7,83.19 12.19,82.68 C15.2 12.06,81.79 v12.06,80.01 U8.8 | IC5.8 v12.06,72.07 12.06,73.85 C32.2
  Bottom 0.406: P6.6 14.61,69.53 v12.06,72.07 v12.06,80.01
+12V  (via drill 0.38)
  Top 0.406: v167,87 D1.C 168.91,86.36 C10.+
  Top 0.61: P8.2 171.45,77.47 168.91,80.01 C10.+
  Bottom 0.406: C228.2 R192.2 169.42,96.39 167,93.98 v167,87
A-A1
  Top 0.152: U15.118 145.54,49.73 146.05,49.21 147.32,49.21 147.96,49.85 154.62,49.85 163.87,59.09 U16.25
A-A2
  Top 0.152: U15.114 146.47,47.73 148.27,49.53 160.66,49.53 163.87,46.32 U16.24
A-A3
  Top 0.152: U15.112 146.31,46.73 147,46.04 147.32,46.04 148.27,46.99 148.27,48.9 148.59,49.21 160.34,49.21 163.37,46.19 U16.23
A-A4
  Top 0.152: U15.110 145.41,45.73 145.73,45.4 147.32,45.4 148.59,46.67 148.59,48.58 148.91,48.9 160.02,48.9 162.87,46.05 U16.22
A-A5
  Top 0.152: U15.107 142.24,42.55 142.56,42.23 144.78,42.23 148.91,46.35 148.91,48.26 149.22,48.58 159.7,48.58 162.37,45.91 U16.21
A-A6
  Top 0.152: U15.105 141.24,42.6 141.92,41.91 145.1,41.91 149.22,46.04 149.22,47.94 149.54,48.26 159.38,48.26 161.87,45.78 U16.20
A-A7
  Top 0.152: U15.103 140.24,42.33 140.97,41.59 145.41,41.59 149.54,45.72 149.54,47.62 149.86,47.94 159.07,47.94 161.37,45.65 U16.19
A-A8
  Top 0.152: U15.101 139.24,42.38 140.34,41.27 145.73,41.27 149.86,45.4 149.86,47.31 150.18,47.62 158.75,47.62 160.87,45.51 U16.18
A-A9
  Top 0.152: U15.99 138.24,42.42 139.7,40.96 146.05,40.96 150.18,45.09 150.18,46.99 150.5,47.31 154.62,47.31 155.87,46.06 U16.8
A-A10